# Altium PCB SysUprTestUULed.PcbDoc
Units mm, origin at the board's own origin, x right, y up, seen from the top; angles counter-clockwise.
Board outline 74 x 89.7 mm, 4 copper layers (Top Layer, Mid-Layer 1, Mid-Layer 2, Bottom Layer), stack 1.572 mm thick; 132 components, 164 nets, 460 pads, 163 vias.
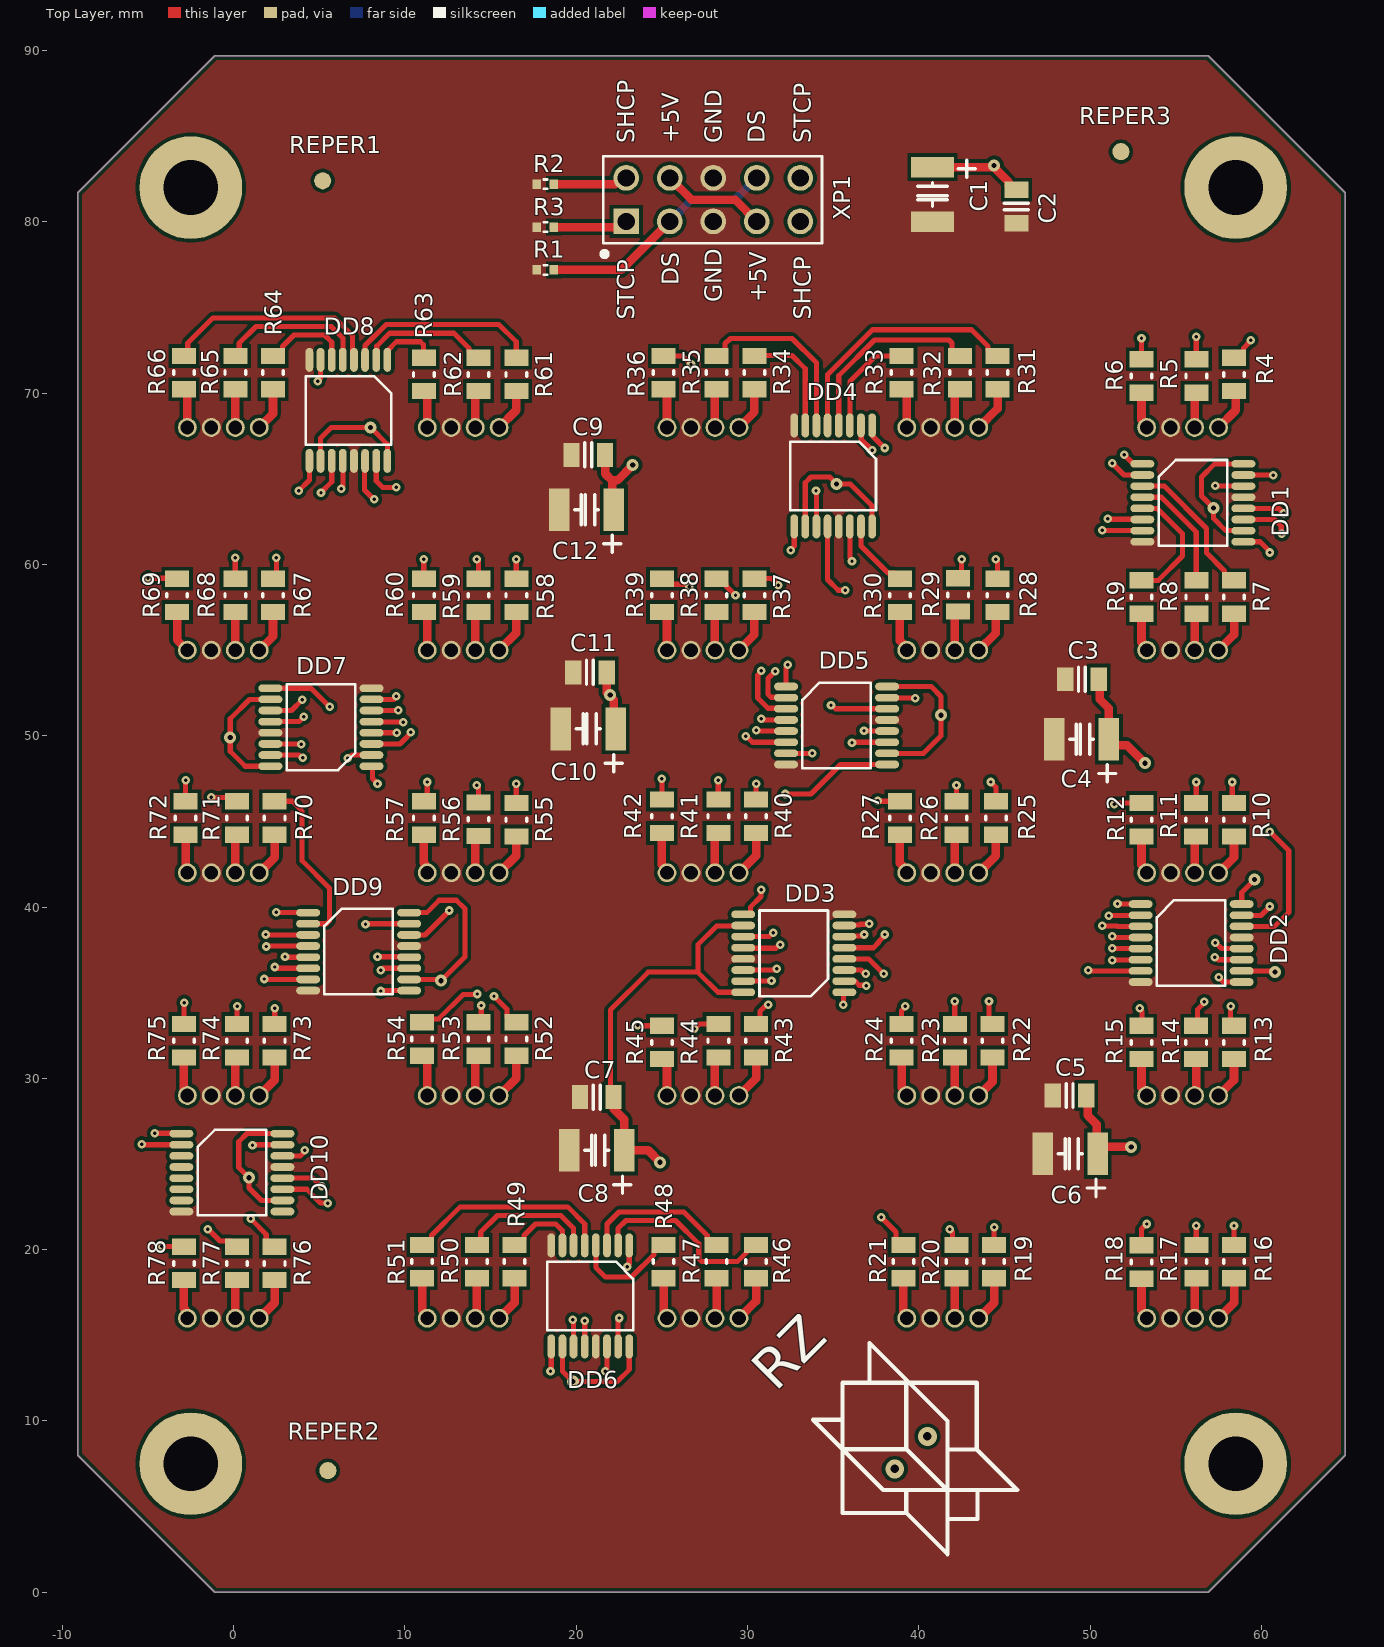
[diagram p0: Top Layer view]
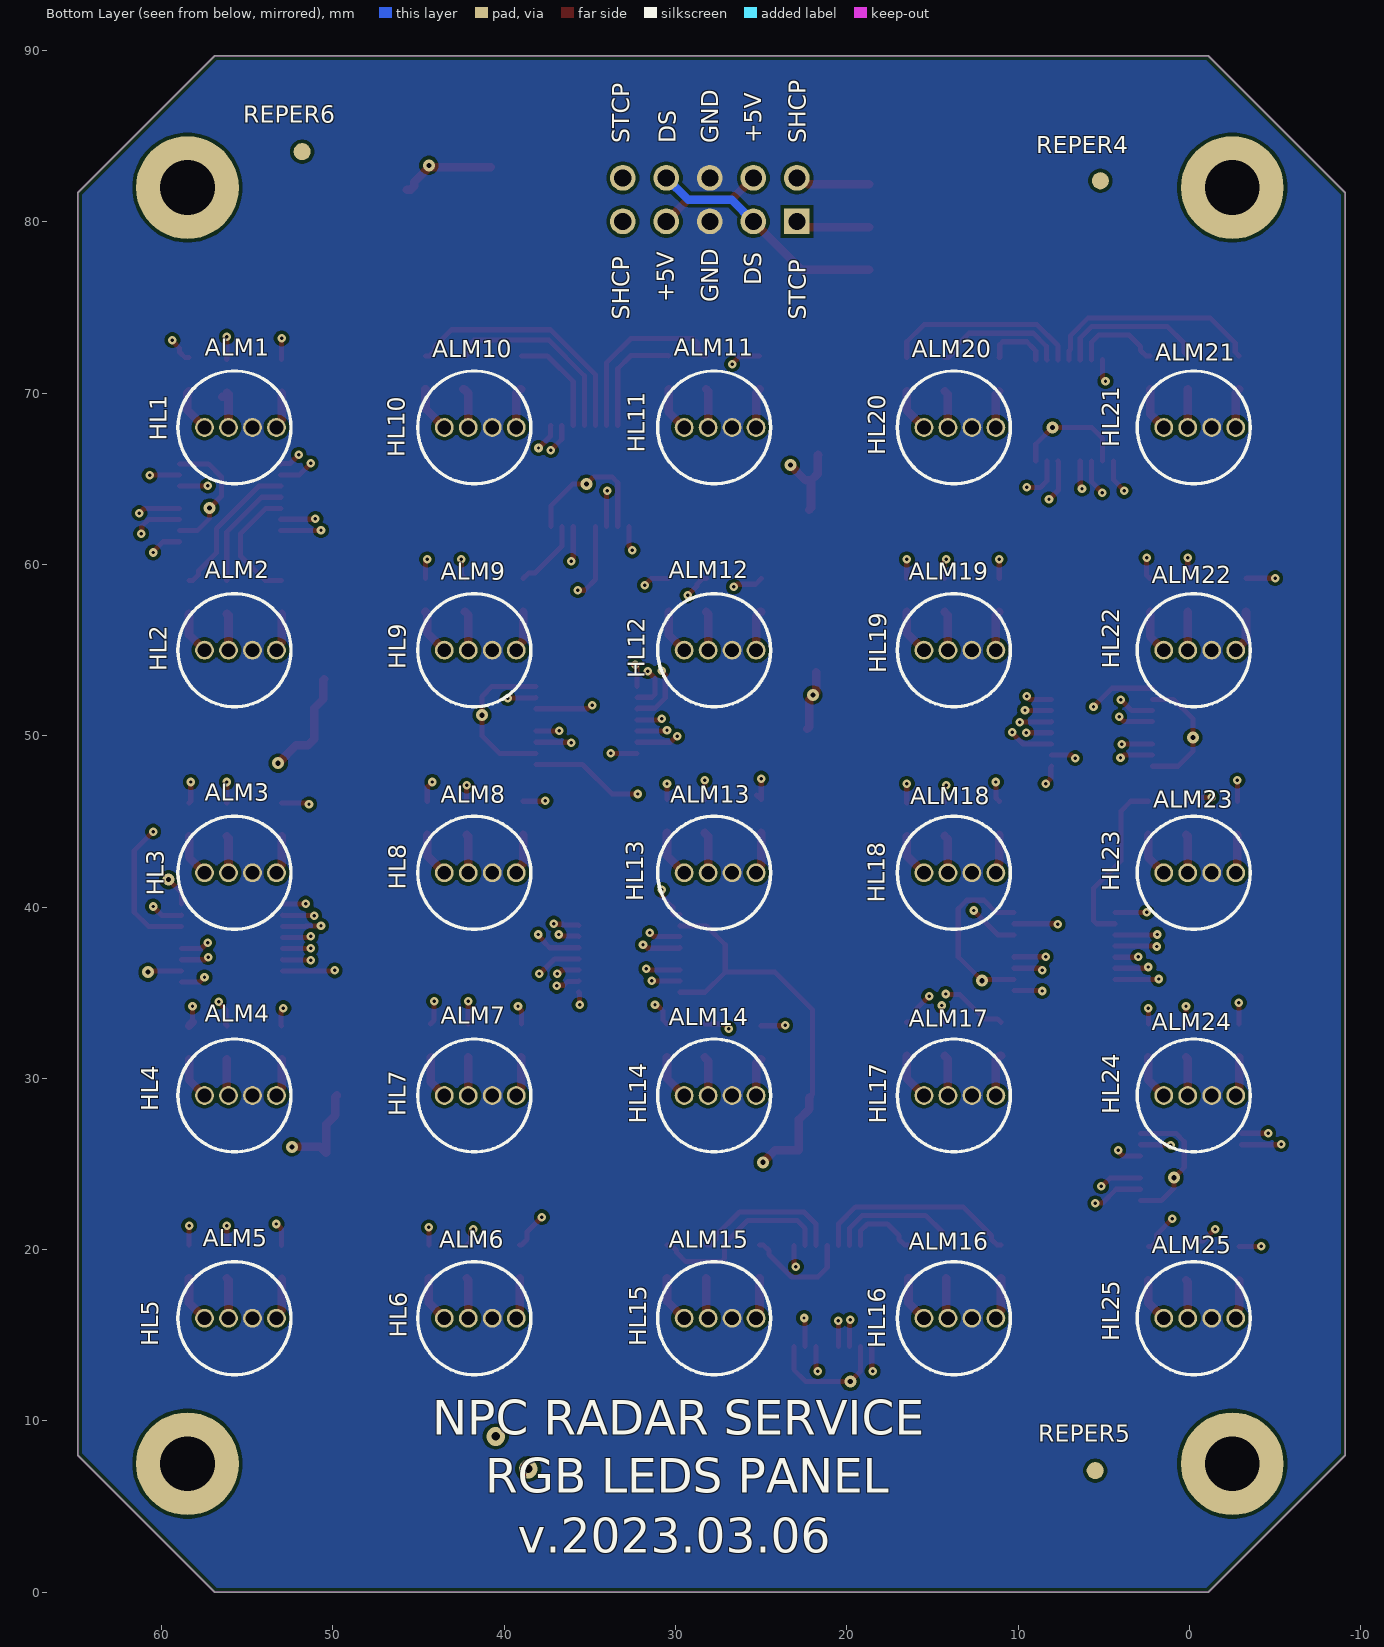
[diagram p1: Bottom Layer view, seen from below]
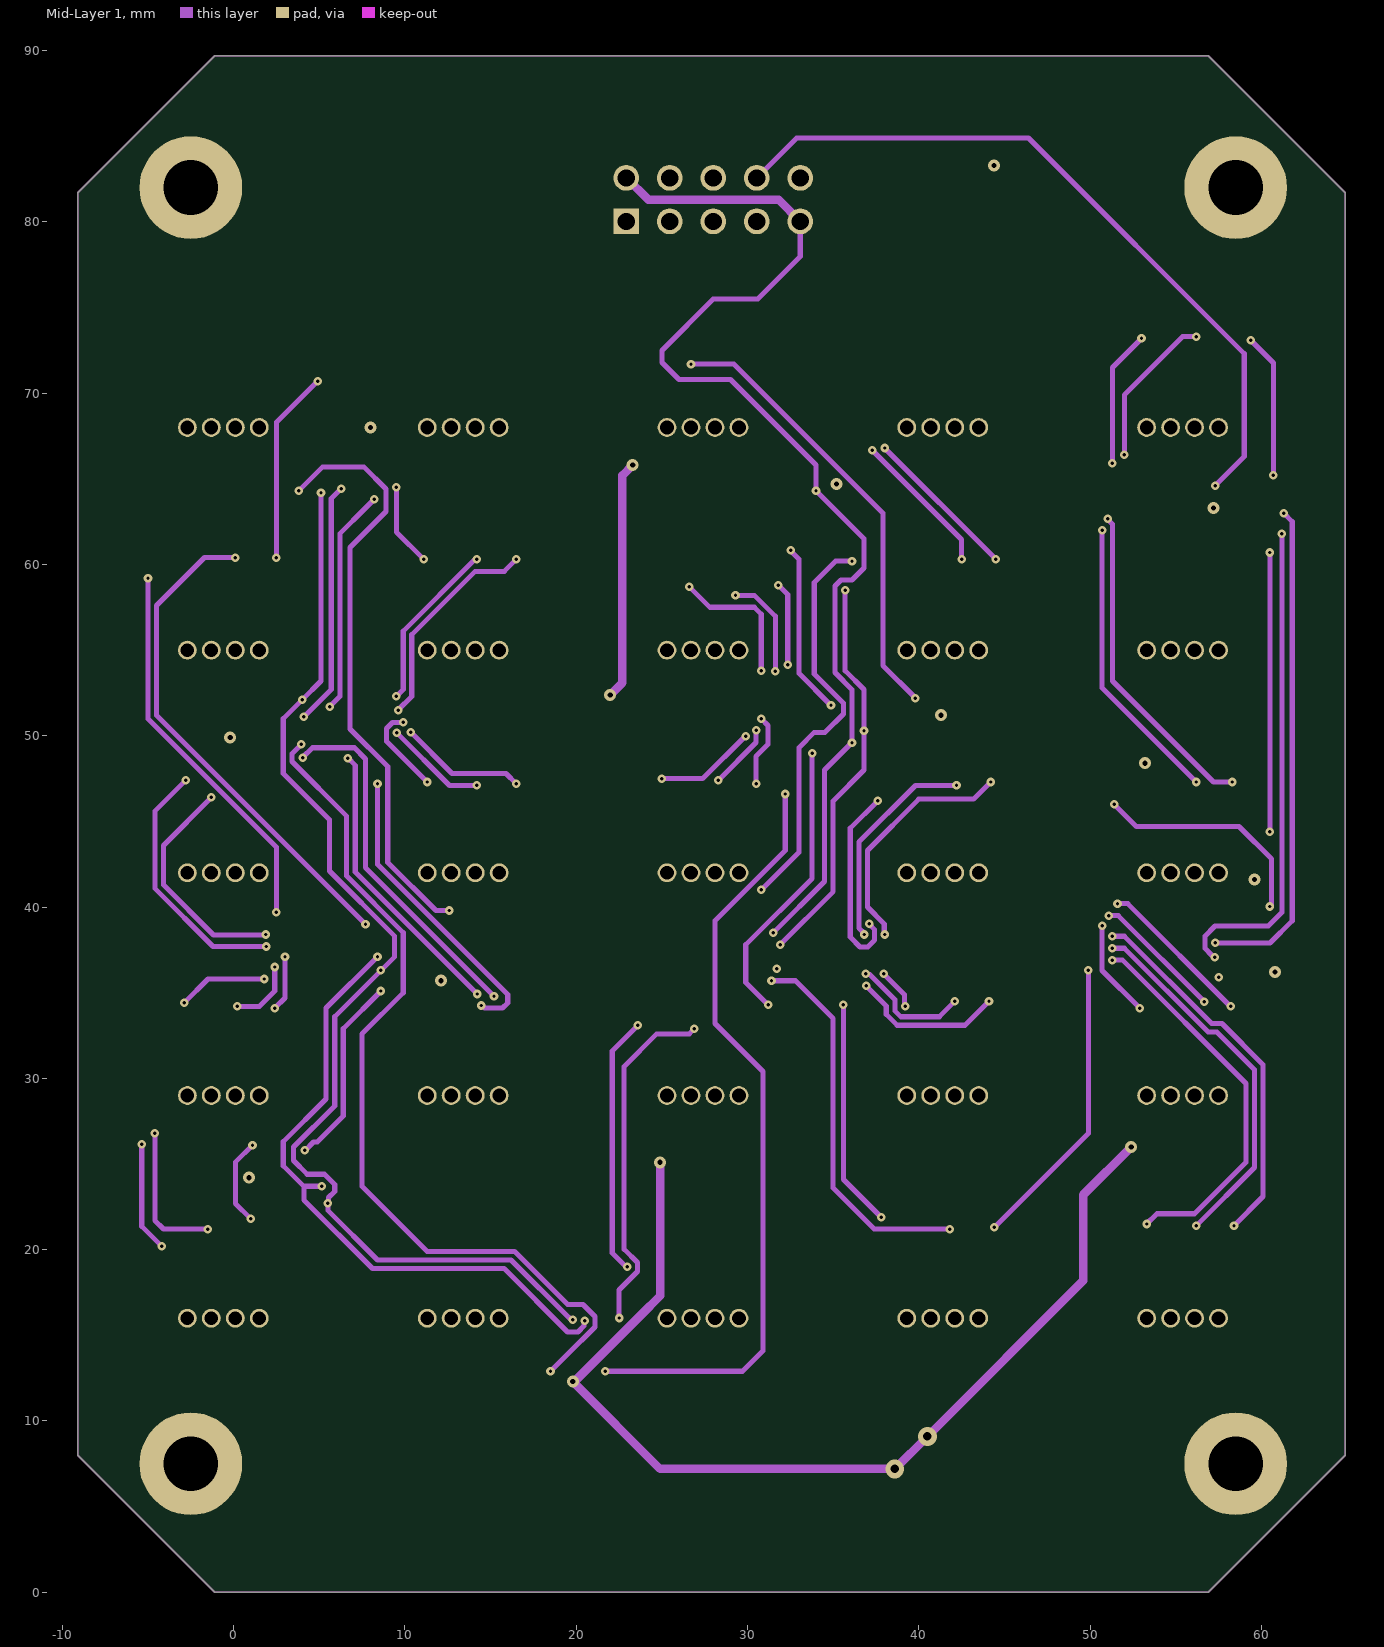
[diagram p2: Mid-Layer 1]
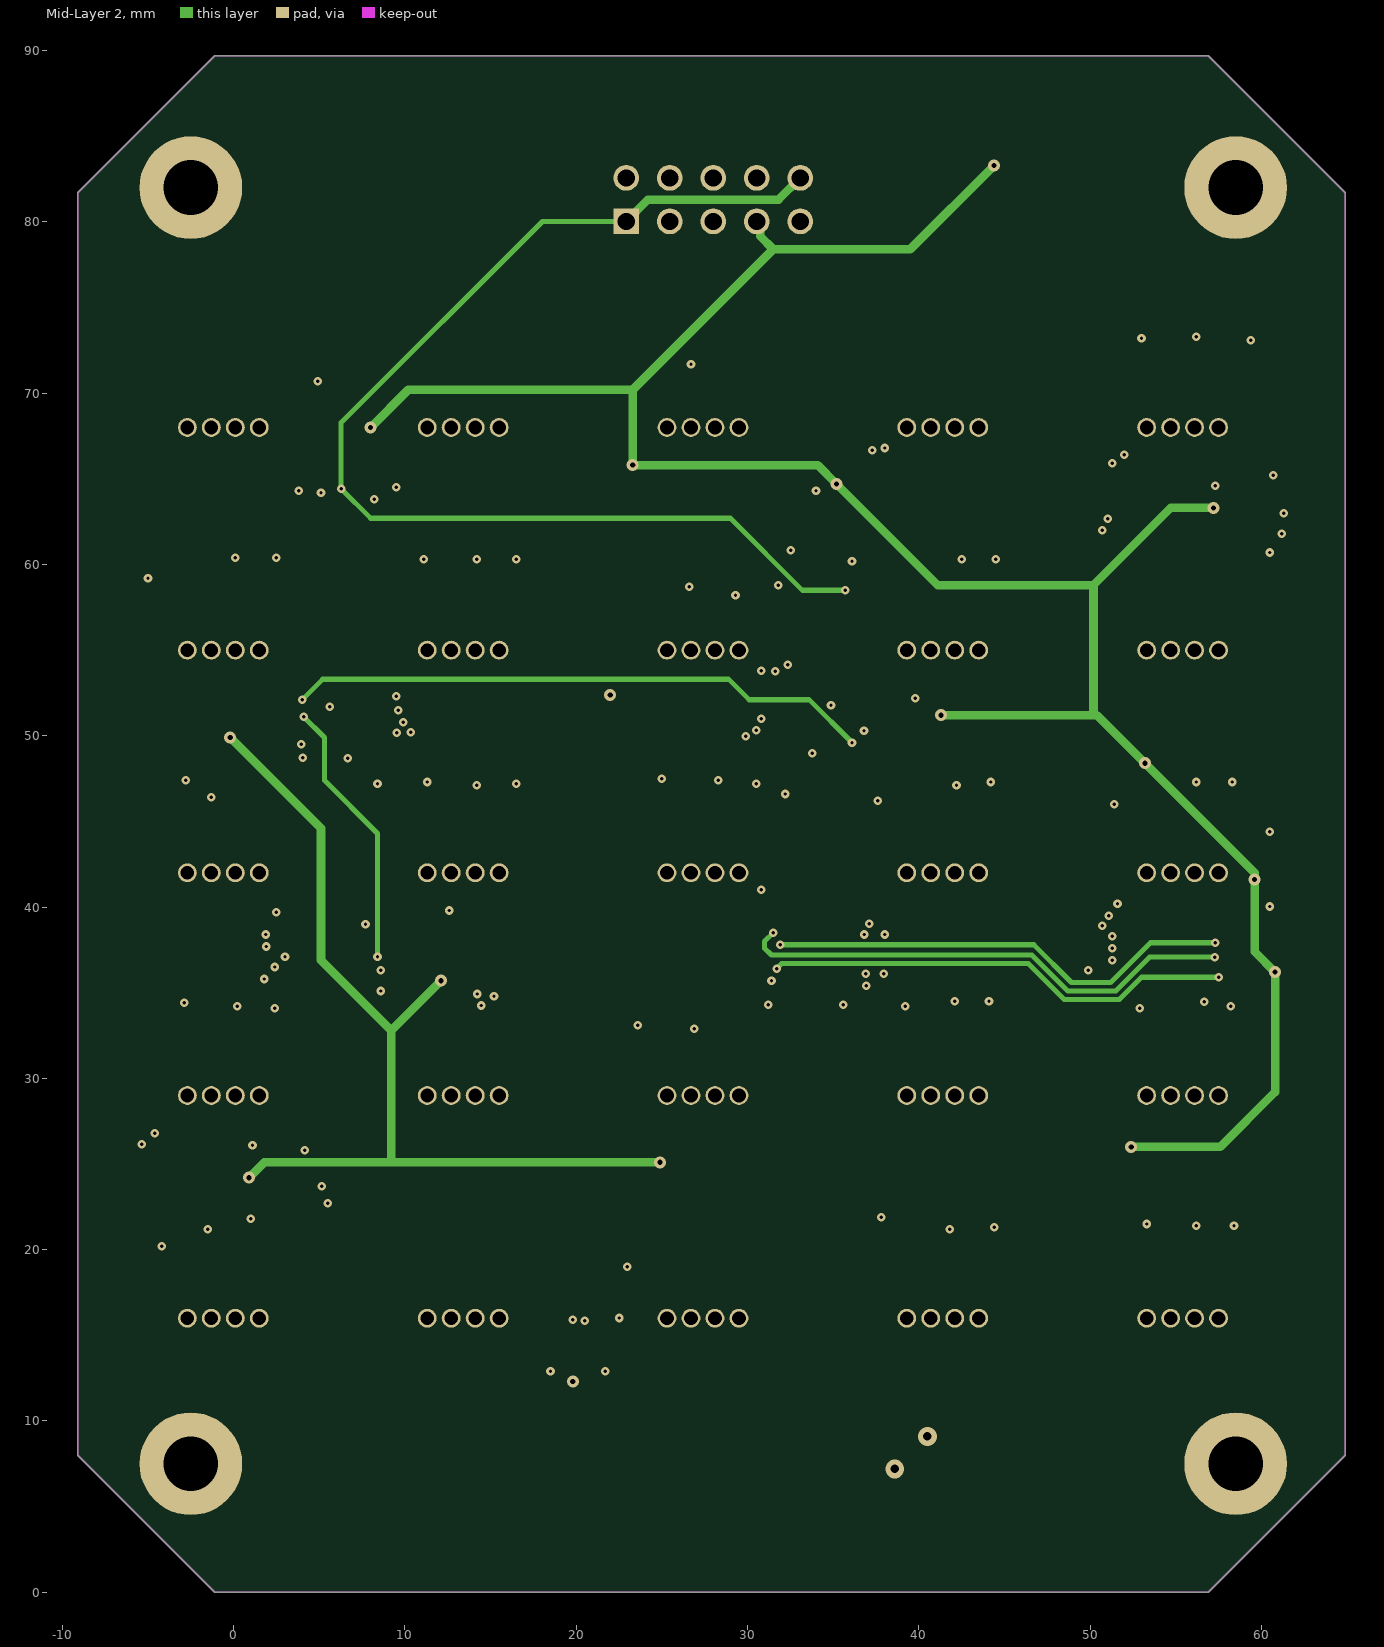
[diagram p3: Mid-Layer 2]

## Layer stack, top to bottom
Top Solder: solder mask 0.0102, Solder Resist, Dk 3.5
Top Layer: signal copper 0.018
Dielectric 2: core 0.5, FR-4, Dk 4.1
Mid-Layer 1: signal copper 0.018
Dielectric 1: prepreg 0.5, FR-4, Dk 4.8
Mid-Layer 2: signal copper 0.018
Dielectric 3: core 0.5, FR-4, Dk 4.1
Bottom Layer: signal copper 0.018
Bottom Solder: solder mask 0.0102, Solder Resist, Dk 3.5

## Board outline
-9.1,8 -9.1,81.7 -1.1,89.7 56.9,89.7 64.9,81.7 64.9,8 56.9,0 -1.1,0

## Design rules (kind name [scope] priority, off if disabled: settings)
Clearance [All] p1: gap=0.2 ignorepadtopadclearanceinfootprint=FALSE except(0: Arc-Hole Track-Hole SMDPad-Hole THPad-Hole Via-Hole Fill-Hole Poly-Hole Region-Hole Text-Hole)
PlaneConnect [All] p1: planeconnectstyle=Direct reliefexpansion=0.508 reliefentries=4 reliefconductorwidth=0.254 reliefairgap=0.254
PolygonConnect [All] p1: connectstyle=Direct reliefconductorwidth=0.254 reliefentries=4 polygonreliefangle="90 Angle" airgapwidth=0.254
RoutingVias [All] p1: holewidth=0.3 width=0.7 viastyle="Through Hole" minholewidth=0.2 minwidth=0.5 maxholewidth=0.5 maxwidth=1.1
SolderMaskExpansion [All] p1: expansion=0.05 istentingtop=FALSE
Width Width_1 [All] p1: maxlimit=1 minlimit=0.3 preferedwidth=0.5
29 further rules are at their usual default settings.

## Components (designator, comment, footprint, x,y, rotation, side; value= is the part's Value field where it differs from the comment)
C1 "PolCap" CapCaseB 40.8,81.6 r180 top value=4,7мк
C2 "Capacitor" Cap0805 45.7,80.9 r0 top value=0,1мк
C3 "Capacitor" Cap0805 49.525,53.3 r90 top value=0,1мк
C4 "PolCap" CapCaseB 49.5,49.8 r90 top value=4,7мк
C5 "Capacitor" Cap0805 48.8,29 r90 top value=0,1мк
C6 "PolCap" CapCaseB 48.846,25.6 r90 top value=4,7мк
C7 "Capacitor" Cap0805 21.2,28.9 r90 top value=0,1мк
C8 "PolCap" CapCaseB 21.2,25.8 r90 top value=4,7мк
C9 "Capacitor" Cap0805 20.7,66.4 r90 top value=0,1мк
C10 "PolCap" CapCaseB 20.7,50.4 r90 top value=4,7мк
C11 "Capacitor" Cap0805 20.8,53.7 r90 top value=0,1мк
C12 "PolCap" CapCaseB 20.6,63.2 r90 top value=4,7мк
DD1 "74HC595" TSSOP16 56,63.6 r0 top
DD2 "74HC595" TSSOP16 55.9,37.9 r0 top
DD3 "74HC595" TSSOP16 32.7,37.3 r180 top
DD4 "74HC595" TSSOP16 35,65.171 r270 top
DD5 "74HC595" TSSOP16 35.2,50.6 r0 top
DD6 "74HC595" TSSOP16 20.821,17.3 r270 top
DD7 "74HC595" TSSOP16 5.1,50.5 r180 top
DD8 "74HC595" TSSOP16 6.7,69 r270 top
DD9 "74HC595" TSSOP16 7.3,37.4 r0 top
DD10 "74HC595" TSSOP16 -0.1,24.5 r0 top
HL1 "LED-RGB_C" BL-L515 57.5,68 r180 bottom
HL2 "LED-RGB_C" BL-L515 57.5,55 r180 bottom
HL3 "LED-RGB_C" BL-L515 57.5,42 r180 bottom
HL4 "LED-RGB_C" BL-L515 57.5,29 r180 bottom
HL5 "LED-RGB_C" BL-L515 57.5,16 r180 bottom
HL6 "LED-RGB_C" BL-L515 43.5,16 r180 bottom
HL7 "LED-RGB_C" BL-L515 43.5,29 r180 bottom
HL8 "LED-RGB_C" BL-L515 43.5,42 r180 bottom
HL9 "LED-RGB_C" BL-L515 43.5,55 r180 bottom
HL10 "LED-RGB_C" BL-L515 43.5,68 r180 bottom
HL11 "LED-RGB_C" BL-L515 29.5,68 r180 bottom
HL12 "LED-RGB_C" BL-L515 29.5,55 r180 bottom
HL13 "LED-RGB_C" BL-L515 29.5,42 r180 bottom
HL14 "LED-RGB_C" BL-L515 29.5,29 r180 bottom
HL15 "LED-RGB_C" BL-L515 29.5,16 r180 bottom
HL16 "LED-RGB_C" BL-L515 15.5,16 r180 bottom
HL17 "LED-RGB_C" BL-L515 15.5,29 r180 bottom
HL18 "LED-RGB_C" BL-L515 15.5,42 r180 bottom
HL19 "LED-RGB_C" BL-L515 15.5,55 r180 bottom
HL20 "LED-RGB_C" BL-L515 15.5,68 r180 bottom
HL21 "LED-RGB_C" BL-L515 1.5,68 r180 bottom
HL22 "LED-RGB_C" BL-L515 1.5,55 r180 bottom
HL23 "LED-RGB_C" BL-L515 1.5,42 r180 bottom
HL24 "LED-RGB_C" BL-L515 1.5,29 r180 bottom
HL25 "LED-RGB_C" BL-L515 1.5,16 r180 bottom
R1 "Resistor0062" Res0402 18.2,77.2 r90 top value=10к
R2 "Resistor0062" Res0402 18.2,82.2 r90 top value=10к
R3 "Resistor0062" Res0402 18.2,79.7 r90 top value=10к
R4 "Resistor0125" Res0805 58.404,71.1 r180 top value=1к
R5 "Resistor0125" Res0805 56.2,71 r180 top value=1к
R6 "Resistor0125" Res0805 53,71 r180 top value=1к
R7 "Resistor0125" Res0805 58.404,58.1 r180 top value=1к
R8 "Resistor0125" Res0805 56.2,58.1 r180 top value=1к
R9 "Resistor0125" Res0805 53,58.1 r180 top value=1к
R10 "Resistor0125" Res0805 58.4,45.1 r180 top value=1к
R11 "Resistor0125" Res0805 56.196,45.1 r180 top value=1к
R12 "Resistor0125" Res0805 53,45.1 r180 top value=1к
R13 "Resistor0125" Res0805 58.4,32.1 r180 top value=1к
R14 "Resistor0125" Res0805 56.196,32.1 r180 top value=1к
R15 "Resistor0125" Res0805 53,32.1 r180 top value=1к
R16 "Resistor0125" Res0805 58.404,19.3 r180 top value=1к
R17 "Resistor0125" Res0805 56.2,19.3 r180 top value=1к
R18 "Resistor0125" Res0805 53,19.275 r180 top value=1к
R19 "Resistor0125" Res0805 44.4,19.3 r180 top value=1к
R20 "Resistor0125" Res0805 42.196,19.3 r180 top value=1к
R21 "Resistor0125" Res0805 39.1,19.3 r180 top value=1к
R22 "Resistor0125" Res0805 44.304,32.2 r180 top value=1к
R23 "Resistor0125" Res0805 42.1,32.2 r180 top value=1к
R24 "Resistor0125" Res0805 39,32.2 r180 top value=1к
R25 "Resistor0125" Res0805 44.5,45.2 r180 top value=1к
R26 "Resistor0125" Res0805 42.2,45.2 r180 top value=1к
R27 "Resistor0125" Res0805 38.9,45.2 r180 top value=1к
R28 "Resistor0125" Res0805 44.6,58.2 r180 top value=1к
R29 "Resistor0125" Res0805 42.3,58.225 r180 top value=1к
R30 "Resistor0125" Res0805 38.9,58.2 r180 top value=1к
R31 "Resistor0125" Res0805 44.6,71.2 r180 top value=1к
R32 "Resistor0125" Res0805 42.396,71.2 r180 top value=1к
R33 "Resistor0125" Res0805 39,71.2 r180 top value=1к
R34 "Resistor0125" Res0805 30.404,71.2 r180 top value=1к
R35 "Resistor0125" Res0805 28.2,71.2 r180 top value=1к
R36 "Resistor0125" Res0805 25.1,71.2 r180 top value=1к
R37 "Resistor0125" Res0805 30.404,58.2 r180 top value=1к
R38 "Resistor0125" Res0805 28.2,58.2 r180 top value=1к
R39 "Resistor0125" Res0805 25,58.2 r180 top value=1к
R40 "Resistor0125" Res0805 30.5,45.3 r180 top value=1к
R41 "Resistor0125" Res0805 28.296,45.3 r180 top value=1к
R42 "Resistor0125" Res0805 25,45.3 r180 top value=1к
R43 "Resistor0125" Res0805 30.5,32.2 r180 top value=1к
R44 "Resistor0125" Res0805 28.296,32.2 r180 top value=1к
R45 "Resistor0125" Res0805 25,32.1 r180 top value=1к
R46 "Resistor0125" Res0805 30.5,19.3 r180 top value=1к
R47 "Resistor0125" Res0805 28.2,19.3 r180 top value=1к
R48 "Resistor0125" Res0805 25.1,19.3 r180 top value=1к
R49 "Resistor0125" Res0805 16.4,19.3 r180 top value=1к
R50 "Resistor0125" Res0805 14.196,19.3 r180 top value=1к
R51 "Resistor0125" Res0805 11,19.3 r180 top value=1к
R52 "Resistor0125" Res0805 16.5,32.3 r180 top value=1к
R53 "Resistor0125" Res0805 14.296,32.3 r180 top value=1к
R54 "Resistor0125" Res0805 11,32.3 r180 top value=1к
R55 "Resistor0125" Res0805 16.5,45.1 r180 top value=1к
R56 "Resistor0125" Res0805 14.296,45.125 r180 top value=1к
R57 "Resistor0125" Res0805 11.1,45.2 r180 top value=1к
R58 "Resistor0125" Res0805 16.5,58.2 r180 top value=1к
R59 "Resistor0125" Res0805 14.296,58.2 r180 top value=1к
R60 "Resistor0125" Res0805 11.1,58.2 r180 top value=1к
R61 "Resistor0125" Res0805 16.5,71.1 r180 top value=1к
R62 "Resistor0125" Res0805 14.296,71.1 r180 top value=1к
R63 "Resistor0125" Res0805 11.1,71.1 r180 top value=1к
R64 "Resistor0125" Res0805 2.3,71.2 r180 top value=1к
R65 "Resistor0125" Res0805 0.096,71.2 r180 top value=1к
R66 "Resistor0125" Res0805 -2.9,71.2 r180 top value=1к
R67 "Resistor0125" Res0805 2.3,58.2 r180 top value=1к
R68 "Resistor0125" Res0805 0.096,58.2 r180 top value=1к
R69 "Resistor0125" Res0805 -3.3,58.2 r180 top value=1к
R70 "Resistor0125" Res0805 2.4,45.2 r180 top value=1к
R71 "Resistor0125" Res0805 0.196,45.2 r180 top value=1к
R72 "Resistor0125" Res0805 -2.8,45.2 r180 top value=1к
R73 "Resistor0125" Res0805 2.4,32.2 r180 top value=1к
R74 "Resistor0125" Res0805 0.196,32.2 r180 top value=1к
R75 "Resistor0125" Res0805 -2.9,32.2 r180 top value=1к
R76 "Resistor0125" Res0805 2.4,19.2 r180 top value=1к
R77 "Resistor0125" Res0805 0.196,19.2 r180 top value=1к
R78 "Resistor0125" Res0805 -2.9,19.2 r180 top value=1к
REPER1 "Comment" REPER1 5.2,82.4 r0 top
REPER2 "Comment" REPER1 5.5,7.1 r0 top
REPER3 "Comment" REPER1 51.8,84.1 r0 top
REPER4 "Comment" REPER1 5.2,82.4 r180 bottom
REPER5 "Comment" REPER1 5.5,7.1 r180 bottom
REPER6 "Comment" REPER1 51.8,84.1 r180 bottom
XP1 "ConnectorP10" PLD-10 28,81.3 r90 top value=10

## Footprints (in the part's own frame and the unit in brackets; to place one, negate y for a bottom-side part, rotate by r counter-clockwise, add the part's x,y. Pads: shape width x height; smd on the part's side, far side on the other; paste and mask are expansions set on the pad)
BL-L515 [mm]
  round 1.1 hole 0.8: 1(0,0) 2(1.4,0) 3(2.8,0) 4(4.2,0)
  silkscreen extent -1.55,-3.3 5.05,3.3, body extent -1.27,-2.95 4.63,2.95, height 9.1
Cap0805 [mm] "Chip Capacitor, 2-Leads, Body 2,00x1,25mm, IPC Medium Density"
  rect 1.4x0.95 smd: 1(0,0.975) 2(0,-0.975)
  silkscreen extent -0.7,-0.2 0.7,0.2, body extent -0.62,-1 0.63,1, height 0.58
CapCaseB [mm]
  rect 2.5x1.2 smd: 1(0,1.6) 2(0,-1.6)
  silkscreen extent -2.5,-2 0.87,0.7, body extent -1.47,-1.85 1.46,1.85, height 2.03
PLD-10 [mm]
  rect 1.5x1.5 hole 1 mask+0: 1(-1.27,5.08)
  round 1.5 hole 1 mask+0: 2(1.27,5.08) 3(-1.27,2.54) 4(1.27,2.54) 5(-1.27,0) 6(1.27,0) 7(-1.27,-2.54) 8(1.27,-2.54) 9(-1.27,-5.08) 10(1.27,-5.08)
  silkscreen extent -3.32,-6.35 2.54,6.5, body extent -2.5,-6.35 2.5,6.35, height 8.5
REPER1 [mm] "Diameter = 1mm"
  round 1 smd mask+0.5: REP(0,0)
Res0402 [mm] "Chip Resistor, 2-Leads, Body 1,00x0,50mm, IPC Medium Density"
  rect 0.55x0.5 smd: 1(0,0.5) 2(0,-0.5)
  silkscreen extent -0.28,-0.1 0.27,0.1, body extent -0.25,-0.5 0.25,0.5, height 0.4
Res0805 [mm] "Chip Resistor, 2-Leads, Body 2,00x1,25mm, IPC Medium Density"
  rect 1.4x0.95 smd: 1(0,0.975) 2(0,-0.975)
  silkscreen extent -0.6,-0.1 0.6,0.1, body extent -0.63,-1 0.63,1, height 0.43
TSSOP16 [mm] "Chip Inductor, 2-Leads, Body 1,00x0,50mm, IPC Medium Density"
  oval 1.4x0.45 smd: 1(-2.95,2.275) 2(-2.95,1.625) 3(-2.95,0.975) 4(-2.95,0.325) 5(-2.95,-0.325) 6(-2.95,-0.975) 7(-2.95,-1.625) 8(-2.95,-2.275) 9(2.95,-2.275) 10(2.95,-1.625) 11(2.95,-0.975) 12(2.95,-0.325) 13(2.95,0.325) 14(2.95,0.975) 15(2.95,1.625) 16(2.95,2.275)
  silkscreen extent -2,-2.5 2,2.5, body extent -3.23,-2.55 3.23,2.55, height 1.25

## Part data
C1 C4 C6 C8 C10 C12: library part 2164, Manufacturer="АО «НИИ ГИРИКОНД»", ManufacturerTU=АЖЯР.673546.001ТУ, Package="K2 (Case B)", PartNumber="К53-56А-16 В-4,7 мкФ±20 %", SolderTemperature=265, TemperatureRange="от минус 60 до 125", VoltageLimit=16, Alternative="Case B 4,7 мкФ, 16 В, ±20 %", Alternative2="К53-56А-16 В-4,7 мкФ±20 % В АДПК.673546.005ТУ", CardKRR=67, ComponentLink1Description=К53-56А, ComponentLink1URL=\\192.168.0.253\U_Base\PDF\C\K53-56.pdf, DataSheet=#\\192.168.0.253\U_Base\PDF\C\К53-56А.pdf#, Group=Конденсаторы, HelpURL=\\192.168.0.253\U_Base\PDF\C\K53-56.pdf, key=2164, MilitaryControl=ВП, Modify=13.03.2019, MountType=ПМ, Name=К53-56А, SolderName=K53-56A-16V-4.7mkF, ViewControl="В, 10%", X_SORT_1=100, X_SORT_2=200, X_SORT_3=1
C2 C3 C5 C7 C9 C11: library part 2161, Manufacturer="ОАО «ВЗРД Монолит»", ManufacturerTU=ФЦТА.673516.016ТУ, Package="0805 (2012)", PartNumber="К10-84в-2012М-50 В-Н90-0,1 мкФ+80 %-20 %-N-A", SolderTemperature=175, TemperatureRange="от минус 60 до 85", VoltageLimit=50, Alternative="0805 0,1 мкФ, 50 В, ±10 %", CardKRR=67, ComponentLink1Description=К10-84, ComponentLink1URL=\\192.168.0.253\U_Base\PDF\C\K10-84.pdf, DataSheet=#\\192.168.0.253\U_Base\PDF\C\K10-84.pdf#, Group=Конденсаторы, HelpURL=\\192.168.0.253\U_Base\PDF\C\K10-84.pdf, key=2161, MilitaryControl=ВП, Modify=13.03.2019, MountType=ПМ, Name=К10-84в, SolderName=K10-84v-2012M-50V-N90-0,1mkF, ViewControl="В, 10%", X_SORT_1=100, X_SORT_2=200, X_SORT_3=1
DD1 DD2 DD3 DD4 DD5 DD6 DD7 DD8 DD9 DD10: library part 40, Manufacturer=ONSemiconductor, Package=TSSOP16, PartNumber=74НС595PW, TemperatureRange="от минус 40 до 125", CardKRR=65, ComponentLink1URL=\\192.168.0.101\U_Base\PDF\D\74HC595PW.pdf, DataSheet=#\\192.168.0.101\U_Base\PDF\D\74HC595PW.pdf#, Group=Микросхемы, HelpURL=\\192.168.0.101\U_Base\PDF\D\74HC595PW.pdf, key=40, MilitaryControl=ОТК, Modify=14.03.2019, MountType=ПМ, Name=74НС595PW, Notice=ONSemiconductor, SolderName=74NS595PW, ViewControl="В, 100%", X_SORT_1=200, X_SORT_2=401, X_SORT_3=1
HL1 HL2 HL3 HL4 HL5 HL6 HL7 HL8 HL9 HL10 HL11 HL12 HL13 HL14 HL15 HL16 HL17 HL18 HL19 HL20 HL21 HL22 HL23 HL24 HL25: library part 90, "Светодиод RGB с общим анодом BL-L515RGBW-CA", Manufacturer="Betlux Electronics", Package=6mm, PartNumber="Светодиод BL-L515RGBW-CС", ComponentLink1Description=BL-L515, ComponentLink1URL="\\192.168.0.101\U_Base\PDF\V\BetLux Electronics.pdf", DataSheet="#\\192.168.0.101\U_Base\PDF\V\BetLux Electronics.pdf#", Group=Светодиоды, HelpURL="\\192.168.0.101\U_Base\PDF\V\BetLux Electronics.pdf", key=90, MilitaryControl=ОТК, Modify=14.03.2019, MountType=РМ, Name=BL-L515, Notice="Betlux Electronics", SolderName=BL-L515, ViewControl="В, 10%", X_SORT_1=500, X_SORT_2=301, X_SORT_3=1
R1 R2 R3: library part 2905, Manufacturer="АО «НПО «Эркон»", ManufacturerTU=ОЖ0.467.164ТУ, Package="0402 (1005)", PartNumber="Р1-8В-0,063-10 кОм±5 %-Т-А", PowerLimit=0,063, SolderTemperature=255, TemperatureRange="от минус 65 до 155", VoltageLimit=50, Alternative="0402 10 кОм, 0,062 Вт, ±5 %", Alternative2="Р1-8В-0,062-10 кОм±5 %-Т-А ОЖ0.467.164ТУ", CardKRR=68, ComponentLink1Description=Р1-8В, ComponentLink1URL=\\192.168.0.253\U_Base\PDF\R\Р1-8В.pdf, DataSheet=#\\192.168.0.253\U_Base\PDF\R\Р1-8В.pdf#, Group=Резисторы, HelpURL=\\192.168.0.253\U_Base\PDF\R\Р1-8В.pdf, key=2905, Mark=103, Mass=0,0007, MilitaryControl=ВП, Modify=28.06.2019, MountType=ПМ, Name=Р1-8В, SolderName=R1-8B-0.063-10kOm, ViewControl="В, 10%", X_SORT_1=400, X_SORT_2=100, X_SORT_3=1
R4 R5 R6 R7 R8 R9 R10 R11 R12 R13 R14 R15 R16 R17 R18 R19 R20 R21 R22 R23 R24 R25 R26 R27 R28 R29 R30 R31 R32 R33 R34 R35 R36 R37 R38 R39 R40 R41 R42 R43 R44 R45 R46 R47 R48 R49 R50 R51 R52 R53 R54 R55 R56 R57 R58 R59 R60 R61 R62 R63 R64 R65 R66 R67 R68 R69 R70 R71 R72 R73 R74 R75 R76 R77 R78: library part 2957, Manufacturer="АО «НПО «Эркон»", ManufacturerTU=ОЖ0.467.164ТУ, Package="0805 (2012)", PartNumber="Р1-8В-0,125-1 кОм±5 %-Т-А", PowerLimit=0,125, SolderTemperature=255, TemperatureRange="от минус 65 до 155", VoltageLimit=150, Alternative="0805 1 кОм, 0,125 Вт, ±5 %", Alternative2="Р1-8В-0,125-1 кОм±5 %-Т-А ОЖ0.467.164ТУ", CardKRR=68, ComponentLink1Description=Р1-8В, ComponentLink1URL=\\192.168.0.101\U_Base\PDF\R\Р1-8В.pdf, DataSheet=#\\192.168.0.101\U_Base\PDF\R\Р1-8В.pdf#, Group=Резисторы, HelpURL=\\192.168.0.101\U_Base\PDF\R\Р1-8В.pdf, key=2957, Mark=102, Mass=0,006, MilitaryControl=ВП, Modify=28.06.2019, MountType=ПМ, Name=Р1-8В, SolderName=R1-8B-0.125-1kOm, ViewControl="В, 10%", X_SORT_1=400, X_SORT_2=100, X_SORT_3=1
REPER1 REPER2 REPER3 REPER4 REPER5 REPER6: library part 27
XP1: library part 45, CurrentLimit=1, Manufacturer="АО «Карачевский завод Электродеталь»", ManufacturerTU=РЮМК.430420.011ТУ, Package=PLD, PartNumber="Вилка СНП346-10ВП22-2-В", PowerLimit=250, TemperatureRange="от минус 60 до 85", Alternative=PLD-10, Alternative2="СНП346-10ВП22-2 РЮМК.430420.019ТУ", CardKRR=75, ComponentLink1Description=СНП346, ComponentLink1URL=\\192.168.0.101\U_Base\PDF\X\СНП346.pdf, Conn01Name=LED_STCP, Conn02Name=LED_SHCP, Conn03Name=LED_DS, Conn04Name=+5V, Conn05Name=GND, Conn06Name=GND, Conn07Name=+5V, Conn08Name=LED_DS, Conn09Name=LED_SHCP, Conn10Name=LED_STCP, Conn11Name=11, Conn12Name=12, Conn13Name=13, Conn14Name=14, Conn15Name=15, Conn16Name=16, Conn17Name=17, Conn18Name=18, Conn19Name=19, Conn20Name=20, Conn21Name=21, Conn22Name=22, Conn23Name=23, Conn24Name=24, Conn25Name=25, Conn26Name=26, Conn27Name=27, Conn28Name=28, Conn29Name=29, Conn30Name=30, Conn31Name=31, Conn32Name=32, Conn33Name=33, Conn34Name=34, Conn35Name=35, Conn36Name=36, Conn37Name=37, Conn38Name=38, Conn39Name=39, Conn40Name=40, DataSheet=#\\192.168.0.101\U_Base\PDF\X\СНП346.pdf#, Group=Соединители, HelpURL=\\192.168.0.101\U_Base\PDF\X\СНП346.pdf, key=45, Mass=0,0006, MilitaryControl=ВП, Modify=19.09.2018, MountType=РМ, Name=СНП346-10ВП22-2-В, SolderName=SNP346-10VP22-2, ViewControl="В, 10%", VoltageLimit=250, X_SORT_1=700, X_SORT_2=600, X_SORT_3=1

## Free pads (board coordinates)
  round 6 hole 3.2 unplated: 0(-2.5,7.5) 0(-2.5,82) 0(58.5,7.5) 0(58.5,82)

## Via types
v1: diameter 0.5, hole 0.2, Top Layer to Bottom Layer, tented both sides, 145 vias
v2: diameter 0.7, hole 0.3, Top Layer to Bottom Layer, tented both sides, 16 vias
v3: diameter 1.1, hole 0.5, Top Layer to Bottom Layer, tented both sides, 2 vias

## Nets (pads, with @x,y where several pads share a name; then routed paths per layer and width w, separated by ;. In a path a pad name is that pad's centre, name@x,y a point inside that pad or via, vN(x,y) a via of type N, cw(c..) or ccw(c..) an arc to the next point about the centre after c; other vN are vias at no path point)
+5V_D: C1.2 C2.1 C3.2 C4.2 C5.2 C6.2 C7.2 C8.2 C9.2 C10.2 C11.2 C12.2 DD1.10 DD1.16 DD2.10 DD2.16 DD3.10 DD3.16 DD4.10 DD4.16 DD5.10 DD5.16 DD6.10 DD6.16 DD7.10 DD7.16 DD8.10 DD8.16 DD9.10 DD9.16 DD10.10 DD10.16 XP1.4 XP1.7 | length 397.6
  Top Layer w0.3: DD7.16 0.675,48.225 -0.2,49.1 -0.2,51 0.925,52.125 DD7.10 ; DD10.10 1.625,22.875 0.9,23.6 v2(0.9,24.2) 0.3,24.8 0.3,26.3 0.775,26.775 DD10.16 ; DD8.10 5.075,67.375 5.7,68 v2(8,68) 8.975,67.025 DD8.16 ; DD9.10 12.025,35.775 v2(12.1,35.7) 13.5,37.1 13.5,39.9 13,40.4 12,40.4 11.275,39.675 DD9.16 ; DD6.10 19.196,12.904 v2(19.8,12.3) 22.4,12.3 23.096,12.996 DD6.16 ; C7.2 22,29.075 22,34 24.2,36.2 27.1,36.2 ; DD3.16 28.275,35.025 27.1,36.2 ; DD3.10 29.725,38.9 28.2,38.9 27.1,37.8 27.1,36.2 ; DD4.10 33.375,64.775 33.7,65.1 34.8,65.1 v2(35.2,64.7) 36,64.7 37.275,63.425 DD4.16 ; DD5.10 40.275,48.975 41.3,50 v2(41.3,51.2) 41.3,52.3 40.725,52.875 DD5.16 ; DD2.10 60.725,36.275 v2(60.8,36.2) ; DD2.16 58.85,40.85 v2(59.6,41.6) ; DD1.10 57.925,61.975 57.2,62.7 v2(57.2,63.3) 56.5,64 56.5,65.1 57.275,65.875 DD1.16
  Top Layer w0.5: C9.2 21.7,66.375 21.7,65.3 22.093,64.907 ; v2@21.775,52.525 C11.2 ; C7.2 22.2,28.875 22.2,28.2 22.8,27.6 C8.2 24.2,25.8 v2(24.9,25.1) ; v2@22.193,52.107 22.193,50.507 C10.2 ; C12.2 22.093,63.307 22.093,64.907 ; v2(23.3,65.8) 22.407,64.907 22.093,64.907 ; XP1.4 26.73,81.3 29.27,81.3 XP1.7 ; C1.2 44.375,83.2 45.25,82.325 45.25,82.1 45.475,81.875 C2.1 ; C5.2 49.855,28.92 49.855,27.845 50.393,27.307 50.393,25.653 50.74,26 v2(52.4,26) ; C3.2 50.557,53.243 50.557,52.143 51.1,51.6 C4.2 51.1,49.793 51.45,49.443 52.157,49.443 v2(53.2,48.4)
  Mid-Layer 1 w0.5: v2(21.984,52.384) 22.7,53.1 22.7,65.2 v2(23.3,65.8) ; v2(24.9,25.1) 24.9,17.3 23.8,16.2 20,12.4 19.954,12.4 19.854,12.3 v2(19.8,12.3) 24.9,7.2 v3(38.6,7.2) v3(40.5,9.1) 49.6,18.2 49.6,23.2 v2(52.4,26)
  Mid-Layer 2 w0.5: v2(-0.2,49.9) 5.1,44.6 5.1,36.9 9.2,32.8 ; v2(0.9,24.2) 1.8,25.1 9.2,25.1 ; v2(8,68) 10.2,70.2 23.3,70.2 ; v2(12.1,35.7) 9.2,32.8 ; v2(24.9,25.1) 9.2,25.1 ; XP1.7 30.731,79.839 30.731,79.169 31.5,78.4 ; v2(41.3,51.2) 50.2,51.2 ; v2(44.4,83.3) 39.5,78.4 31.5,78.4 ; v2(52.4,26) 57.6,26 60.8,29.2 v2(60.8,36.2) 59.6,37.4 v2(59.6,41.6) 59.6,42 v2(53.2,48.4) 50.4,51.2 50.2,51.2 ; v2(57.2,63.3) 54.7,63.3 50.2,58.8 ; 9.2,25.1 9.2,32.8 ; 23.3,70.2 v2(23.3,65.8) 34.1,65.8 v2(35.2,64.7) 41.1,58.8 50.2,58.8 ; 23.3,70.2 31.5,78.4 ; 50.2,51.2 50.2,58.8
GND: C1.1 C2.2 C3.1 C4.1 C5.1 C6.1 C7.1 C8.1 C9.1 C10.1 C11.1 C12.1 DD1.8 DD1.13 DD2.8 DD2.13 DD3.8 DD3.13 DD4.8 DD4.13 DD5.8 DD5.13 DD6.8 DD6.13 DD7.8 DD7.13 DD8.8 DD8.13 DD9.8 DD9.13 DD10.8 DD10.13 HL1.3 HL2.3 HL3.3 HL4.3 HL5.3 HL6.3 HL7.3 HL8.3 HL9.3 HL10.3 HL11.3 HL12.3 HL13.3 HL14.3 HL15.3 HL16.3 HL17.3 HL18.3 HL19.3 HL20.3 HL21.3 HL22.3 HL23.3 HL24.3 HL25.3 R1.1 R2.1 R3.1 XP1.5 XP1.6
NetDD1_9: DD1.9 DD2.14 | length 26.4
  Top Layer w0.3: DD2.14 60.775,38.875 61.6,39.7 61.6,43.3 v1(60.5,44.4) ; DD1.9 59.924,61.325 60.5,60.749 v1(60.5,60.7)
  Mid-Layer 1 w0.3: v1(60.5,44.4) v1(60.5,60.7)
NetDD3_9: DD3.9 DD4.14 | length 27.9
  Top Layer w0.3: DD3.9 30.096,39.575 30.165,39.644 30.165,39.99 30.793,40.618 30.793,40.993 v1(30.8,41) ; DD4.14 35.975,60.379 36.1,60.254 v1(36.1,60.2)
  Mid-Layer 1 w0.3: v1(30.8,41) 33,43.2 33,49.3 33.9,50.2 34.524,50.2 35.6,51.276 35.6,51.9 33.9,53.6 33.9,58.949 35.151,60.2 v1(36.1,60.2)
NetDD5_9: DD5.9 DD6.14 | length 53.2
  Top Layer w0.3: v1(21.704,12.904) 21.796,12.996 DD6.14 ; v1(32.2,46.6) 33.7,46.6 35.425,48.325 DD5.9
  Mid-Layer 1 w0.3: v1(21.704,12.904) 29.704,12.904 30.9,14.1 30.9,30.4 28.1,33.2 28.1,39.2 32.2,43.3 v1(32.2,46.6)
NetDD7_9: DD7.9 DD8.14 | length 19.6
  Top Layer w0.3: DD7.9 4.525,52.775 v1(5.6,51.7) ; DD8.14 7.646,66.021 7.646,64.354 v1(8.2,63.8)
  Mid-Layer 1 w0.3: v1(5.6,51.7) 6.2,52.3 6.2,61.8 7.7,63.3 v1(8.2,63.8)
NetDD9_9: DD9.9 DD10.14 | length 14.4
  Top Layer w0.3: DD10.14 3.888,25.475 4.117,25.705 4.117,25.762 v1(4.156,25.8) ; v1(8.6,35.1) 8.625,35.125 DD9.9
  Mid-Layer 1 w0.3: v1(4.156,25.8) 4.188,25.8 4.667,26.279 4.879,26.279 6.4,27.8 6.4,32.9 v1(8.6,35.1)
NetHL1_1: HL1.1 R4.1 | length 2.6
  Top Layer w0.5: HL1.1 58.5,69 58.5,70.029 R4.1
NetHL1_2: HL1.2 R5.1 | length 2.1
  Top Layer w0.5: HL1.2 56.1,69.925 R5.1
NetHL1_4: HL1.4 R6.1 | length 2.1
  Top Layer w0.5: R6.1 53,68.462 53.3,68.162 HL1.4
NetHL2_1: HL2.1 R7.1 | length 2.5
  Top Layer w0.5: HL2.1 58.404,55.904 R7.1
NetHL2_2: HL2.2 R8.1 | length 2.2
  Top Layer w0.5: HL2.2 56.1,57.025 R8.1
NetHL2_4: HL2.4 R9.1 | length 2.2
  Top Layer w0.5: R9.1 53,55.462 53.3,55.162 HL2.4
NetHL3_1: HL3.1 R10.1 | length 2.5
  Top Layer w0.5: HL3.1 58.4,42.9 R10.1
NetHL3_2: HL3.2 R11.1 | length 2.2
  Top Layer w0.5: HL3.2 56.1,44.029 R11.1
NetHL3_4: HL3.4 R12.1 | length 2.2
  Top Layer w0.5: R12.1 53,42.462 53.3,42.162 HL3.4
NetHL4_1: HL4.1 R13.1 | length 2.5
  Top Layer w0.5: HL4.1 58.4,29.9 R13.1
NetHL4_2: HL4.2 R14.1 | length 2.2
  Top Layer w0.5: HL4.2 56.196,29.096 R14.1
NetHL4_4: HL4.4 R15.1 | length 2.2
  Top Layer w0.5: R15.1 53,29.462 53.3,29.162 HL4.4
NetHL5_1: HL5.1 R16.1 | length 2.7
  Top Layer w0.5: HL5.1 58.404,16.904 R16.1
NetHL5_2: HL5.2 R17.1 | length 2.4
  Top Layer w0.5: HL5.2 56.1,18.225 R17.1
NetHL5_4: HL5.4 R18.1 | length 2.4
  Top Layer w0.5: R18.1 53,16.462 53.3,16.162 HL5.4
NetHL6_1: HL6.1 R19.1 | length 2.7
  Top Layer w0.5: HL6.1 44.4,16.9 R19.1
NetHL6_2: HL6.2 R20.1 | length 2.4
  Top Layer w0.5: HL6.2 42.1,18.229 R20.1
NetHL6_4: HL6.4 R21.1 | length 2.4
  Top Layer w0.5: R21.1 39.1,16.362 39.3,16.162 HL6.4
NetHL7_1: HL7.1 R22.1 | length 2.6
  Top Layer w0.5: HL7.1 44.304,29.804 R22.1
NetHL7_2: HL7.2 R23.1 | length 2.2
  Top Layer w0.5: HL7.2 R23.1
NetHL7_4: HL7.4 R24.1 | length 2.3
  Top Layer w0.5: R24.1 39,29.462 39.3,29.162 HL7.4
NetHL8_1: HL8.1 R25.1 | length 2.6
  Top Layer w0.5: HL8.1 44.5,43 R25.1
NetHL8_2: HL8.2 R26.1 | length 2.3
  Top Layer w0.5: HL8.2 42.1,44.125 R26.1
NetHL8_4: HL8.4 R27.1 | length 2.4
  Top Layer w0.5: R27.1 38.9,42.562 39.3,42.162 HL8.4
NetHL9_1: HL9.1 R28.1 | length 2.7
  Top Layer w0.5: HL9.1 44.5,56 44.5,57.125 R28.1
NetHL9_2: HL9.2 R29.1 | length 2.3
  Top Layer w0.5: HL9.2 42.1,57.05 R29.1
NetHL9_4: HL9.4 R30.1 | length 2.4
  Top Layer w0.5: R30.1 38.9,55.562 39.3,55.162 HL9.4
NetHL10_1: HL10.1 R31.1 | length 2.7
  Top Layer w0.5: HL10.1 44.6,69.1 R31.1
NetHL10_2: HL10.2 R32.1 | length 2.4
  Top Layer w0.5: HL10.2 42.1,70 42.325,70.225 R32.1
NetHL10_4: HL10.4 R33.1 | length 2.4
  Top Layer w0.5: R33.1 39.075,70.225 39.3,70 HL10.4
NetHL11_1: HL11.1 R34.1 | length 2.6
  Top Layer w0.5: HL11.1 30.404,68.904 R34.1
NetHL11_2: HL11.2 R35.1 | length 2.3
  Top Layer w0.5: HL11.2 28.1,70.125 R35.1
NetHL11_4: HL11.4 R36.1 | length 2.3
  Top Layer w0.5: R36.1 25.3,70.025 HL11.4
NetHL12_1: HL12.1 R37.1 | length 2.6
  Top Layer w0.5: HL12.1 30.404,55.904 R37.1
NetHL12_2: HL12.2 R38.1 | length 2.3
  Top Layer w0.5: HL12.2 28.1,57.125 R38.1
NetHL12_4: HL12.4 R39.1 | length 2.4
  Top Layer w0.5: R39.1 25.075,57.225 25.3,57 HL12.4
NetHL13_1: HL13.1 R40.1 | length 2.7
  Top Layer w0.5: HL13.1 30.5,43 R40.1
NetHL13_2: HL13.2 R41.1 | length 2.4
  Top Layer w0.5: HL13.2 28.1,44.129 R41.1
NetHL13_4: HL13.4 R42.1 | length 2.4
  Top Layer w0.5: R42.1 25,42.462 25.3,42.162 HL13.4
NetHL14_1: HL14.1 R43.1 | length 2.6
  Top Layer w0.5: HL14.1 30.5,30 R43.1
NetHL14_2: HL14.2 R44.1 | length 2.3
  Top Layer w0.5: HL14.2 28.1,31.029 R44.1
NetHL14_4: HL14.4 R45.1 | length 2.3
  Top Layer w0.5: R45.1 25.075,31.125 25.3,30.9 HL14.4
NetHL15_1: HL15.1 R46.1 | length 2.7
  Top Layer w0.5: HL15.1 30.5,17 R46.1
NetHL15_2: HL15.2 R47.1 | length 2.4
  Top Layer w0.5: HL15.2 28.2,16.1 R47.1
NetHL15_4: HL15.4 R48.1 | length 2.4
  Top Layer w0.5: R48.1 25.1,16.362 25.3,16.162 HL15.4
NetHL16_1: HL16.1 R49.1 | length 2.7
  Top Layer w0.5: HL16.1 16.4,16.9 R49.1
NetHL16_2: HL16.2 R50.1 | length 2.4
  Top Layer w0.5: HL16.2 14.196,16.096 R50.1
NetHL16_4: HL16.4 R51.1 | length 2.4
  Top Layer w0.5: R51.1 11,16.462 11.3,16.162 HL16.4
NetHL17_1: HL17.1 R52.1 | length 2.7
  Top Layer w0.5: HL17.1 16.5,30 R52.1
NetHL17_2: HL17.2 R53.1 | length 2.4
  Top Layer w0.5: HL17.2 14.1,31.129 R53.1
NetHL17_4: HL17.4 R54.1 | length 2.5
  Top Layer w0.5: R54.1 11.075,31.325 11.3,31.1 HL17.4
NetHL18_1: HL18.1 R55.1 | length 2.5
  Top Layer w0.5: HL18.1 16.5,43 R55.1
NetHL18_2: HL18.2 R56.1 | length 2.2
  Top Layer w0.5: HL18.2 14.1,43.954 R56.1
NetHL18_4: HL18.4 R57.1 | length 2.3
  Top Layer w0.5: R57.1 11.1,42.593 11.185,42.508 11.185,42.115 HL18.4
NetHL19_1: HL19.1 R58.1 | length 2.6
  Top Layer w0.5: HL19.1 16.5,56 R58.1
NetHL19_2: HL19.2 R59.1 | length 2.3
  Top Layer w0.5: HL19.2 14.1,57.029 R59.1
NetHL19_4: HL19.4 R60.1 | length 2.3
  Top Layer w0.5: R60.1 11.3,57.025 HL19.4
NetHL20_1: HL20.1 R61.1 | length 2.5
  Top Layer w0.5: HL20.1 16.5,69 R61.1
NetHL20_2: HL20.2 R62.1 | length 2.2
  Top Layer w0.5: HL20.2 14.1,69.929 R62.1
NetHL20_4: HL20.4 R63.1 | length 2.2
  Top Layer w0.5: R63.1 11.3,69.925 HL20.4
NetHL21_1: HL21.1 R64.1 | length 2.6
  Top Layer w0.5: HL21.1 2.3,68.8 R64.1
NetHL21_2: HL21.2 R65.1 | length 2.2
  Top Layer w0.5: R65.1 0.1,70.221 HL21.2
NetHL21_4: HL21.4 R66.1 | length 2.3
  Top Layer w0.5: R66.1 -2.7,70.025 HL21.4
NetHL22_1: HL22.1 R67.1 | length 2.6
  Top Layer w0.5: HL22.1 2.3,55.8 R67.1
NetHL22_2: HL22.2 R68.1 | length 2.2
  Top Layer w0.5: R68.1 0.1,57.221 HL22.2
NetHL22_4: HL22.4 R69.1 | length 2.5
  Top Layer w0.5: R69.1 -3.3,55.6 HL22.4
NetHL23_1: HL23.1 R70.1 | length 2.6
  Top Layer w0.5: HL23.1 2.4,42.9 R70.1
NetHL23_2: HL23.2 R71.1 | length 2.3
  Top Layer w0.5: HL23.2 0.1,44.129 R71.1
NetHL23_4: HL23.4 R72.1 | length 2.3
  Top Layer w0.5: R72.1 -2.8,42.1 HL23.4
NetHL24_1: HL24.1 R73.1 | length 2.6
  Top Layer w0.5: HL24.1 2.4,29.9 R73.1
NetHL24_2: HL24.2 R74.1 | length 2.3
  Top Layer w0.5: HL24.2 0.1,31.129 R74.1
NetHL24_4: HL24.4 R75.1 | length 2.3
  Top Layer w0.5: R75.1 -2.9,29.362 -2.7,29.162 HL24.4
NetHL25_1: HL25.1 R76.1 | length 2.6
  Top Layer w0.5: HL25.1 2.4,16.9 R76.1
NetHL25_2: HL25.2 R77.1 | length 2.3
  Top Layer w0.5: HL25.2 0.1,18.129 R77.1
NetHL25_4: HL25.4 R78.1 | length 2.3
  Top Layer w0.5: R78.1 -2.9,16.593 -2.815,16.508 -2.815,16.115 HL25.4
SR0: DD1.15 R4.2 | length 11.8
  Top Layer w0.3: R4.2 58.629,72.075 58.954,72.4 58.954,72.625 59.371,73.041 v1(59.371,73.1) ; DD1.15 60.271,65.225 60.278,65.232 60.668,65.232 v1(60.7,65.2)
  Mid-Layer 1 w0.3: v1(59.371,73.1) 60.7,71.771 v1(60.7,65.2)
SR1: DD1.1 R5.2 | length 11.7
  Top Layer w0.3: v1(52,66.4) 52.45,65.95 52.459,65.95 52.509,65.9 53.025,65.9 DD1.1 ; R5.2 v1(56.2,73.3)
  Mid-Layer 1 w0.3: v1(52,66.4) 52,69.9 55.4,73.3 v1(56.2,73.3)
SR2: DD1.2 R6.2 | length 11.3
  Top Layer w0.3: v1(51.3,65.9) 51.975,65.225 DD1.2 ; R6.2 v1(53,73.2)
  Mid-Layer 1 w0.3: v1(51.3,65.9) 51.3,71.5 v1(53,73.2)
SR3: DD1.3 R7.2 | length 8.6
  Top Layer w0.3: DD1.3 54.325,64.575 56.8,62.1 56.8,60.679 57.854,59.625 57.854,59.4 58.179,59.075 R7.2
SR4: DD1.4 R8.2 | length 6.8
  Top Layer w0.3: DD1.4 54.175,63.925 56.2,61.9 R8.2
SR5: DD1.5 R9.2 | length 7.3
  Top Layer w0.3: R9.2 53.975,59.075 55.4,60.5 55.4,61.8 53.925,63.275 DD1.5
SR6: DD1.6 R10.2 | length 22.3
  Top Layer w0.3: v1(51.025,62.663) 51.044,62.644 53.031,62.644 DD1.6 ; v1(58.3,47.3) 58.3,46.175 R10.2
  Mid-Layer 1 w0.3: v1(51.025,62.663) 51.025,62.625 51.3,62.35 51.3,53.2 57.2,47.3 v1(58.3,47.3)
SR7: DD1.7 R11.2 | length 20.6
  Top Layer w0.3: v1(50.7,62) 50.725,61.975 DD1.7 ; R11.2 56.2,46.079 v1(56.2,47.3)
  Mid-Layer 1 w0.3: v1(50.7,62) 50.7,52.8 v1(56.2,47.3)
SR8: DD2.15 R12.2 | length 16.8
  Top Layer w0.3: v1(51.4,46) 51.475,46.075 R12.2 ; DD2.15 58.862,39.512 59.977,39.512 v1(60.5,40.035)
  Mid-Layer 1 w0.3: v1(51.4,46) 52.7,44.7 58.7,44.7 60.6,42.8 60.6,40.189 60.5,40.089 v1(60.5,40.035)
SR9: DD2.1 R13.2 | length 11.7
  Top Layer w0.3: v1(51.6,40.2) 51.625,40.175 DD2.1 ; R13.2@58.2,33.275 v1(58.2,34.2)
  Top Layer w0.5: R13.2@58.2,33.275 R13.2
  Mid-Layer 1 w0.3: v1(51.6,40.2) 52.2,40.2 v1(58.2,34.2)
SR10: DD2.2 R14.2 | length 11.1
  Top Layer w0.3: v1(51.1,39.5) 52.925,39.5 DD2.2 ; R14.2 56.261,33.14 56.261,34.007 56.674,34.42 v1(56.674,34.474)
  Mid-Layer 1 w0.3: v1(51.1,39.5) 51.649,39.5 v1(56.674,34.474)
SR11: DD2.3 R15.2 | length 9.1
  Top Layer w0.3: v1(50.7,38.9) 51.576,38.9 51.601,38.875 DD2.3 ; v1(52.9,34.1) 52.9,34.046 53.034,33.912 53.034,33.109 R15.2
  Mid-Layer 1 w0.3: v1(50.7,38.9) 50.7,36.3 v1(52.9,34.1)
SR12: DD2.4 R16.2 | length 24.8
  Top Layer w0.3: v1(51.3,38.3) 51.354,38.3 51.429,38.225 DD2.4 ; v1(58.4,21.4) 58.404,21.396 R16.2
  Mid-Layer 1 w0.3: v1(51.3,38.3) 52,38.3 57.1,33.2 57.7,33.2 60.1,30.8 60.1,23.1 v1(58.4,21.4)
SR13: DD2.5 R17.2 | length 24.5
  Top Layer w0.3: v1(51.3,37.6) 51.325,37.575 DD2.5 ; R17.2 v1(56.2,21.4)
  Mid-Layer 1 w0.3: v1(51.3,37.6) 51.993,37.6 56.893,32.7 57.4,32.7 59.6,30.5 59.6,24.8 v1(56.2,21.4)
SR14: DD2.6 R18.2 | length 25.7
  Top Layer w0.3: v1(51.3,36.9) 52.925,36.9 DD2.6 ; R18.2 53,21.2 v1(53.3,21.5)
  Mid-Layer 1 w0.3: v1(51.3,36.9) 51.9,36.9 59.1,29.7 59.1,25.1 56.1,22.1 53.9,22.1 v1(53.3,21.5)
SR15: DD2.7 R19.2 | length 21.4
  Top Layer w0.3: R19.2 v1(44.4,21.3) ; v1(49.9,36.3) 49.925,36.275 DD2.7
  Mid-Layer 1 w0.3: v1(44.4,21.3) 49.9,26.8 v1(49.9,36.3)
SR16: DD3.15 R20.2 | length 25
  Top Layer w0.3: DD3.15 31.375,35.675 v1(31.4,35.7) ; v1(41.8,21.2) 41.976,21.024 41.976,20.495 R20.2
  Mid-Layer 1 w0.3: v1(31.4,35.7) 32.8,35.7 35,33.5 35,23.6 37.4,21.2 v1(41.8,21.2)
SR17: DD3.1 R21.2 | length 16.3
  Top Layer w0.3: v1(35.6,34.3) 35.6,34.975 DD3.1 ; v1(37.8,21.9) 38.676,21.024 38.676,20.6 39.001,20.275 R21.2
  Mid-Layer 1 w0.3: v1(35.6,34.3) 35.6,24.1 v1(37.8,21.9)
SR18: DD3.2 R22.2 | length 11.8
  Top Layer w0.3: DD3.2 35.679,35.646 36.317,35.646 36.525,35.439 36.888,35.439 v1(36.927,35.401) ; v1(44.1,34.5) 44.1,33.379 R22.2
  Mid-Layer 1 w0.3: v1(36.927,35.401) 38.1,34.227 38.1,33.744 38.744,33.1 42.7,33.1 v1(44.1,34.5)
SR19: DD3.3 R23.2 | length 9.7
  Top Layer w0.3: DD3.3 36.632,36.325 36.857,36.1 v1(36.9,36.1) ; R23.2 v1(42.1,34.5)
  Mid-Layer 1 w0.3: v1(36.9,36.1) 36.938,36.062 37.138,36.062 38.6,34.6 38.6,33.951 38.951,33.6 41.2,33.6 v1(42.1,34.5)
SR20: DD3.4 R24.2 | length 6.2
  Top Layer w0.3: DD3.4 37.073,36.975 v1(37.949,36.1) ; R24.2 39,33.946 39.2,34.146 v1(39.2,34.2)
  Mid-Layer 1 w0.3: v1(37.949,36.1) 39.162,34.887 39.162,34.238 v1(39.2,34.2)
SR21: DD3.5 R25.2 | length 18.2
  Top Layer w0.3: DD3.5 37.349,37.625 37.684,37.961 37.684,38.007 38.023,38.346 v1(38.023,38.4) ; v1(44.2,47.3) 44.5,47 R25.2
  Mid-Layer 1 w0.3: v1(38.023,38.4) 37.985,38.438 37.985,39.015 37,40 37,43.3 40,46.3 43.2,46.3 v1(44.2,47.3)
SR22: DD3.6 R26.2 | length 14.8
  Top Layer w0.3: DD3.6 35.679,38.304 36.673,38.304 36.769,38.4 v1(36.823,38.4) ; R26.2 v1(42.2,47.1)
  Mid-Layer 1 w0.3: v1(36.823,38.4) 36.823,38.454 36.5,38.778 36.5,43.8 39.8,47.1 v1(42.2,47.1)
SR23: DD3.7 R27.2 | length 14.4
  Top Layer w0.3: DD3.7 35.679,38.954 36.529,38.954 36.575,39 37.079,39 v1(37.115,39.036) ; v1(37.6,46.2) 37.625,46.175 R27.2
  Mid-Layer 1 w0.3: v1(37.115,39.036) 37.115,38.982 37.423,38.674 37.423,38.074 37.024,37.675 36.575,37.675 36,38.25 36,44.6 v1(37.6,46.2)
SR24: DD4.15 R30.2 | length 4.2
  Top Layer w0.3: DD4.15 36.625,61.075 38.2,59.5 38.575,59.5 R30.2
SR25: DD4.1 R28.2 | length 12
  Top Layer w0.3: DD4.1 37.304,68.092 37.304,67.496 v1(38,66.8) ; v1(44.5,60.3) 44.5,60.246 44.6,60.146 R28.2
  Mid-Layer 1 w0.3: v1(38,66.8) v1(44.5,60.3)
SR26: DD4.2 R29.2 | length 11.4
  Top Layer w0.3: DD4.2 36.643,68.103 36.643,67.309 v1(37.276,66.676) ; R29.2 42.5,59.4 v1(42.5,60.3)
  Mid-Layer 1 w0.3: v1(37.276,66.676) 42.5,61.451 v1(42.5,60.3)
SR27: DD4.3 R33.2 | length 6.2
  Top Layer w0.3: DD4.3 35.975,70.675 37.475,72.175 R33.2
SR28: DD4.4 R32.2 | length 11.5
  Top Layer w0.3: DD4.4 35.325,71.018 37.407,73.1 41.758,73.1 41.934,72.924 41.934,72.5 42.259,72.175 R32.2
SR29: DD4.5 R31.2 | length 14.7
  Top Layer w0.3: DD4.5 34.675,71.075 37.3,73.7 43.075,73.7 44.05,72.725 44.05,72.5 44.375,72.175 R31.2
SR30: DD4.6 R35.2 | length 10.7
  Top Layer w0.3: R35.2 28.368,72.175 28.693,72.5 28.693,72.893 29,73.2 32.6,73.2 34.025,71.775 DD4.6
SR31: DD4.7 R34.2 | length 6.6
  Top Layer w0.3: R34.2 30.429,72.2 32.6,72.2 33.375,71.425 DD4.7
SR32: DD5.15 R36.2 | length 29.8
  Top Layer w0.3: R36.2 26.225,72.175 v1(26.7,71.7) ; DD5.15 38.175,52.2 v1(39.8,52.2)
  Mid-Layer 1 w0.3: v1(26.7,71.7) 29.2,71.7 37.9,63 37.9,54.1 v1(39.8,52.2)
SR33: DD5.1 R37.2 | length 7.7
  Top Layer w0.3: R37.2 31.425,59.175 v1(31.8,58.8) ; DD5.1 32.25,53.996 32.35,54.096 v1(32.35,54.15)
  Mid-Layer 1 w0.3: v1(31.8,58.8) 32.35,58.25 v1(32.35,54.15)
SR34: DD5.2 R38.2 | length 10.3
  Top Layer w0.3: R38.2 28.425,59.175 28.75,58.85 28.75,58.75 v1(29.3,58.2) ; v1(31.624,53.776) 31.2,53.351 31.2,52.429 31.376,52.254 32.221,52.254 DD5.2
  Mid-Layer 1 w0.3: v1(29.3,58.2) 30.4,58.2 31.624,56.976 v1(31.624,53.776)
SR35: DD5.3 R39.2 | length 13.5
  Top Layer w0.3: R39.2 25.325,58.85 26.396,58.85 26.546,58.7 v1(26.6,58.7) ; v1(30.8,53.8) 30.8,53.746 30.6,53.546 30.6,52.2 31.196,51.604 32.221,51.604 DD5.3
  Mid-Layer 1 w0.3: v1(26.6,58.7) 27.8,57.5 30.393,57.5 30.8,57.093 v1(30.8,53.8)
SR36: DD5.4 R40.2 | length 6.7
  Top Layer w0.3: R40.2 v1(30.5,47.2) ; v1(30.8,51) 30.854,51 30.929,50.925 DD5.4
  Mid-Layer 1 w0.3: v1(30.5,47.2) 30.5,48.8 31.2,49.5 31.2,50.6 v1(30.8,51)
SR37: DD5.5 R41.2 | length 6.7
  Top Layer w0.3: R41.2 28.296,47.304 28.3,47.309 v1(28.3,47.4) ; v1(30.5,50.325) 30.538,50.287 30.668,50.287 30.679,50.275 DD5.5
  Mid-Layer 1 w0.3: v1(28.3,47.4) 30.5,49.6 v1(30.5,50.325)
SR38: DD5.6 R42.2 | length 10
  Top Layer w0.3: v1(25,47.5) R42.2 R42.2@25.268,46.543 ; v1(29.9,49.964) 29.954,49.964 30.294,49.625 DD5.6
  Mid-Layer 1 w0.3: v1(25,47.5) 27.382,47.5 29.846,49.964 v1(29.9,49.964)
SR39: DD5.7 R43.2 | length 19.8
  Top Layer w0.3: R43.2 30.724,33.399 30.724,33.924 31.062,34.262 31.162,34.262 v1(31.2,34.3) ; DD5.7 v1(33.775,48.975)
  Mid-Layer 1 w0.3: v1(31.2,34.3) 29.9,35.6 29.9,37.8 33.775,41.675 v1(33.775,48.975)
SR40: DD6.15 R44.2 | length 23.7
  Top Layer w0.3: DD6.15 22.446,15.903 22.5,15.957 v1(22.5,16.011) ; v1(26.9,32.9) 27.175,33.175 R44.2
  Mid-Layer 1 w0.3: v1(22.5,16.011) 22.5,17.647 23.576,18.724 23.576,19.249 22.8,20.025 22.8,30.7 24.7,32.6 26.6,32.6 v1(26.9,32.9)
SR41: DD6.1 R45.2 | length 17.8
  Top Layer w0.3: v1(22.976,19) 22.976,19.054 23.096,19.173 DD6.1 ; v1(23.6,33.1) 23.625,33.075 R45.2
  Mid-Layer 1 w0.3: v1(22.976,19) 22.922,19 22.822,19.1 22.8,19.1 22.1,19.8 22.1,31.6 v1(23.6,33.1)
SR42: DD6.2 R46.2 | length 11.2
  Top Layer w0.3: DD6.2 22.446,21.246 22.9,21.7 25.8,21.7 27.15,20.35 27.15,19.476 27.326,19.3 29.4,19.3 29.95,19.85 29.95,19.95 30.275,20.275 R46.2
SR43: DD6.3 R47.2 | length 8.9
  Top Layer w0.3: DD6.3 21.796,21.496 22.5,22.2 26.275,22.2 27.65,20.825 27.65,20.6 27.975,20.275 R47.2
SR44: DD6.4 R48.2 | length 6.4
  Top Layer w0.3: DD6.4 21.146,18.954 21.7,18.4 23.225,18.4 24.55,19.725 24.55,19.95 24.875,20.275 R48.2
SR45: DD6.5 R51.2 | length 12.2
  Top Layer w0.3: R51.2 11.225,20.275 11.55,20.6 11.55,20.825 13.225,22.5 19.5,22.5 20.496,21.504 DD6.5
SR46: DD6.6 R50.2 | length 8
  Top Layer w0.3: R50.2 14.424,20.504 14.424,21.024 15.4,22 19.1,22 19.846,21.254 DD6.6
SR47: DD6.7 R49.2 | length 4.5
  Top Layer w0.3: R49.2 16.625,20.275 16.95,20.6 16.95,20.825 17.625,21.5 18.8,21.5 19.196,21.104 DD6.7
SR48: DD7.15 R52.2 | length 25.3
  Top Layer w0.3: DD7.15 3.819,48.875 3.97,48.724 v1(4.024,48.724) ; v1(15.2,34.8) 15.95,34.05 15.95,33.6 16.275,33.275 R52.2
  Mid-Layer 1 w0.3: v1(4.024,48.724) 4.6,49.3 6.4,49.3 7.049,49.3 7.7,48.649 7.7,42.3 v1(15.2,34.8)
SR49: DD7.1 R53.2 | length 19.9
  Top Layer w0.3: DD7.1 8.05,48.206 8.1,48.156 8.1,47.5 v1(8.4,47.2) ; R53.2 14.455,33.434 v1(14.455,34.255)
  Mid-Layer 1 w0.3: v1(8.4,47.2) 8.4,42.5 16,34.9 16,34.4 15.7,34.1 14.664,34.1 14.509,34.255 v1(14.455,34.255)
SR50: DD7.2 R54.2 | length 22.3
  Top Layer w0.3: v1(6.674,48.7) 6.728,48.7 6.9,48.872 8.047,48.872 DD7.2 ; R54.2 11.199,33.474 11.974,33.474 13.387,34.887 14.187,34.887 v1(14.226,34.926)
  Mid-Layer 1 w0.3: v1(6.674,48.7) 7.1,48.274 7.1,42.051 v1(14.226,34.926)
SR51: DD7.3 R55.2 | length 11.2
  Top Layer w0.3: DD7.3 8.063,49.513 9.711,49.513 10.125,49.927 10.125,49.948 10.336,50.159 v1(10.336,50.213) ; R55.2 v1(16.5,47.2)
  Mid-Layer 1 w0.3: v1(10.336,50.213) 12.749,47.8 15.9,47.8 v1(16.5,47.2)
SR52: DD7.4 R56.2 | length 8.5
  Top Layer w0.3: DD7.4 v1(9.525,50.175) ; v1(14.2,47.1) 14.2,47.046 14.296,46.95 R56.2
  Mid-Layer 1 w0.3: v1(9.525,50.175) 12.6,47.1 v1(14.2,47.1)
SR53: DD7.5 R57.2 | length 8.3
  Top Layer w0.3: DD7.5 8.063,50.813 9.887,50.813 v1(9.9,50.8) ; R57.2 11.3,46.375 v1(11.3,47.3)
  Mid-Layer 1 w0.3: v1(9.9,50.8) 9.875,50.775 9.276,50.775 8.925,50.424 8.925,49.675 v1(11.3,47.3)
SR54: DD7.6 R58.2 | length 15.3
  Top Layer w0.3: DD7.6 9.575,51.475 v1(9.6,51.5) ; R58.2 v1(16.5,60.3)
  Mid-Layer 1 w0.3: v1(9.6,51.5) 10.4,52.3 10.4,55.9 14.1,59.6 15.8,59.6 v1(16.5,60.3)
SR55: DD7.7 R59.2 | length 12.7
  Top Layer w0.3: DD7.7 9.325,52.125 v1(9.5,52.3) ; v1(14.2,60.3) 14.2,60.246 14.296,60.15 R59.2
  Mid-Layer 1 w0.3: v1(9.5,52.3) 9.9,52.7 9.9,56.107 14.093,60.3 v1(14.2,60.3)
SR56: DD8.15 R60.2 | length 8.5
  Top Layer w0.3: DD8.15 8.325,64.875 8.7,64.5 v1(9.5,64.5) ; R60.2 v1(11.1,60.3)
  Mid-Layer 1 w0.3: v1(9.5,64.5) 9.5,61.9 v1(11.1,60.3)
SR57: DD8.1 R63.2 | length 3.7
  Top Layer w0.3: DD8.1 8.975,72.466 9.05,72.541 9.05,72.55 9.5,73 10.9,73 11.076,72.824 11.076,72.099 R63.2
SR58: DD8.2 R62.2 | length 7.8
  Top Layer w0.3: DD8.2 8.354,71.979 8.354,72.746 9.107,73.5 12.871,73.5 13.746,72.625 13.746,72.4 14.071,72.075 R62.2
SR59: DD8.3 R61.2 | length 11.5
  Top Layer w0.3: DD8.3 7.677,71.953 7.677,72.777 8.9,74 15.5,74 16.5,73 R61.2
SR60: DD8.4 R66.2 | length 12.9
  Top Layer w0.3: R66.2 -2.676,72.399 -2.676,72.924 -1.2,74.4 5.907,74.4 6.95,73.357 6.95,72.541 7.025,72.466 DD8.4
SR61: DD8.5 R65.2 | length 8.9
  Top Layer w0.3: R65.2 0.324,72.404 0.324,72.924 1.3,73.9 5.7,73.9 6.375,73.225 DD8.5
SR62: DD8.6 R64.2 | length 5.3
  Top Layer w0.3: R64.2 2.525,72.175 2.85,72.5 2.85,72.725 3.525,73.4 5.3,73.4 5.725,72.975 DD8.6
SR63: DD8.7 R67.2 | length 13.9
  Top Layer w0.3: R67.2 2.5,59.375 v1(2.5,60.4) ; v1(4.9,70.7) 5.075,70.875 DD8.7
  Mid-Layer 1 w0.3: v1(2.5,60.4) 2.5,68.3 v1(4.9,70.7)
SR64: DD9.15 R68.2 | length 33.2
  Top Layer w0.3: R68.2 0.096,60.396 v1(0.1,60.4) ; v1(7.7,39) 7.725,39.025 DD9.15
  Mid-Layer 1 w0.3: v1(0.1,60.4) -1.7,60.4 -4.5,57.6 -4.5,51.2 v1(7.7,39)
SR65: DD9.1 R69.2 | length 26.2
  Top Layer w0.3: v1(-5,59.2) -3.325,59.2 R69.2 ; v1(2.5,39.7) 2.525,39.675 DD9.1
  Mid-Layer 1 w0.3: v1(-5,59.2) -5,50.993 2.5,43.493 v1(2.5,39.7)
SR66: DD9.2 R70.2 | length 10.2
  Top Layer w0.3: R70.2 3.425,46.175 4,45.6 4,42.7 5.6,41.1 5.6,39.201 5.424,39.025 DD9.2
SR67: DD9.3 R71.2 | length 17.5
  Top Layer w0.3: v1(-1.3,46.4) -0.029,46.4 R71.2 ; v1(1.874,38.4) 1.899,38.375 DD9.3
  Mid-Layer 1 w0.3: v1(-1.3,46.4) -4.1,43.6 -4.1,41.3 -1.175,38.375 1.849,38.375 v1(1.874,38.4)
SR68: DD9.4 R72.2 | length 18.6
  Top Layer w0.3: R72.2 v1(-2.8,47.4) ; v1(1.9,37.7) 1.925,37.725 DD9.4
  Mid-Layer 1 w0.3: v1(-2.8,47.4) -4.6,45.6 -4.6,41.093 -1.207,37.7 v1(1.9,37.7)
SR69: DD9.5 R73.2 | length 5.5
  Top Layer w0.3: R73.2 v1(2.4,34.1) ; v1(3,37.1) 3.025,37.075 DD9.5
  Mid-Layer 1 w0.3: v1(2.4,34.1) 3,34.7 v1(3,37.1)
SR70: DD9.6 R74.2 | length 7
  Top Layer w0.3: R74.2 0.2,33.179 v1(0.2,34.2) ; v1(2.4,36.5) 2.454,36.5 2.529,36.425 DD9.6
  Mid-Layer 1 w0.3: v1(0.2,34.2) 1.5,34.2 2.4,35.1 v1(2.4,36.5)
SR71: DD9.7 R75.2 | length 9.1
  Top Layer w0.3: R75.2 -2.9,34.4 v1(-2.881,34.419) ; v1(1.8,35.8) 1.825,35.775 DD9.7
  Mid-Layer 1 w0.3: v1(-2.881,34.419) -1.5,35.8 v1(1.8,35.8)
SR72: DD10.15 R76.2 | length 9.2
  Top Layer w0.3: v1(1,21.8) 1.907,20.893 1.907,20.5 2.232,20.175 R76.2 ; v1(1.1,26.1) 1.125,26.125 DD10.15
  Mid-Layer 1 w0.3: v1(1,21.8) 0.1,22.7 0.1,25.1 v1(1.1,26.1)
SR73: DD10.1 R77.2 | length 12.1
  Top Layer w0.3: v1(-4.6,26.8) -3.075,26.8 DD10.1 ; v1(-1.5,21.2) -0.8,20.5 -0.129,20.5 R77.2
  Mid-Layer 1 w0.3: v1(-4.6,26.8) -4.6,21.7 -4.1,21.2 v1(-1.5,21.2)
SR74: DD10.2 R78.2 | length 10.1
  Top Layer w0.3: v1(-5.362,26.162) -5.325,26.125 DD10.2 ; v1(-4.2,20.2) -4.175,20.175 R78.2
  Mid-Layer 1 w0.3: v1(-5.362,26.162) -5.362,21.362 v1(-4.2,20.2)
SR_DS: DD1.14 R1.2 XP1.3 XP1.8 | length 58.8
  Top Layer w0.3: v1(57.3,64.6) 57.325,64.575 DD1.14
  Top Layer w0.5: R1.2 22.63,77.2 XP1.3
  Mid-Layer 1 w0.3: XP1.8 32.87,84.9 46.4,84.9 59,72.3 59,66.3 v1(57.3,64.6)
  Bottom Layer w0.5: XP1.3 26.73,81.3 29.27,81.3 XP1.8
SR_DS1: DD2.9 DD3.14 | length 30.8
  Top Layer w0.3: DD3.14 31.571,36.325 31.646,36.4 v1(31.7,36.4) ; v1(57.5,35.9) 57.775,35.625 DD2.9
  Mid-Layer 2 w0.3: v1(31.7,36.4) 32,36.7 46.393,36.7 48.493,34.6 51.707,34.6 53.007,35.9 v1(57.5,35.9)
SR_DS2: DD4.9 DD5.14 | length 14.9
  Top Layer w0.3: v1(32.526,60.826) 32.526,60.88 32.725,61.079 DD4.9 ; v1(34.876,51.776) 34.93,51.776 35.131,51.575 DD5.14
  Mid-Layer 1 w0.3: v1(32.526,60.826) 32.526,60.784 33,60.31 33,53.651 v1(34.876,51.776)
SR_DS3: DD6.9 DD7.14 | length 54
  Top Layer w0.3: DD7.14 2.159,49.516 3.95,49.516 v1(3.959,49.507) ; v1(18.5,12.9) 18.546,12.946 DD6.9
  Mid-Layer 1 w0.3: v1(3.959,49.507) 3.4,48.949 3.4,48.5 6.6,45.3 6.6,41.807 9.9,38.507 9.9,35 7.5,32.6 7.5,23.7 11.3,19.9 16.407,19.9 19.507,16.8 20.4,16.8 21.1,16.1 21.1,15.493 20.307,14.7 20.3,14.7 v1(18.5,12.9)
SR_DS4: DD8.9 DD9.14 | length 39.5
  Top Layer w0.3: v1(3.8,64.3) 4.425,64.925 DD8.9 ; DD9.14 11.175,38.375 v1(12.6,39.8)
  Mid-Layer 1 w0.3: v1(3.8,64.3) 5.2,65.7 7.6,65.7 8.9,64.4 8.9,63.1 6.8,61 6.8,50.4 9,48.2 9,42.607 11.807,39.8 v1(12.6,39.8)
SR_SHCP: DD1.11 DD2.11 DD3.11 DD4.11 DD5.11 DD6.11 DD7.11 DD8.11 DD9.11 DD10.11 R2.2 XP1.2 XP1.9 | length 251.7
  Top Layer w0.3: DD7.11 3.375,51.475 v1(4,52.1) ; DD10.11 4.275,23.525 5.078,22.722 5.478,22.722 v1(5.5,22.7) ; v1(5.1,64.2) 5.725,64.825 DD8.11 ; v1(8.6,36.3) 8.725,36.425 DD9.11 ; v1(19.8,15.9) 19.8,15.846 19.846,15.8 DD6.11 ; DD3.11 31.275,38.275 v1(31.5,38.5) ; v1(34,64.3) 34.025,64.275 DD4.11 ; v1(36.1,49.6) 36.125,49.625 DD5.11 ; v1(57.286,37.08) 57.32,37.08 57.475,36.925 DD2.11 ; DD1.11 60.775,62.625 61.162,62.238 61.162,61.838 v1(61.2,61.8)
  Top Layer w0.5: R2.2 22.279,82.2 22.649,82.57 XP1.2
  Mid-Layer 1 w0.3: v1(5.1,64.2) 5.1,53.2 v1(4,52.1) 2.9,51 2.9,47.8 5.6,45.1 5.6,42.1 9.4,38.3 9.4,37.1 5.9,33.6 5.9,28.393 3.5,25.993 3.5,25.2 4.3,24.4 5.3,24.4 5.9,23.8 5.9,23.4 5.538,23.038 5.538,22.738 v1(5.5,22.7) 5.5,22.3 8.4,19.4 16.2,19.4 19.6,16 19.646,16 19.746,15.9 v1(19.8,15.9) ; v1(31.5,38.5) 34.5,41.5 34.5,48 v1(36.1,49.6) 36.1,52.693 35.1,53.693 35.1,58.749 35.451,59.1 36.1,59.1 36.8,59.8 36.8,61.5 v1(34,64.3) 34,65.8 29,70.8 26,70.8 25,71.8 25,72.5 28,75.5 30.6,75.5 33.08,77.98 XP1.9 ; v1(57.286,37.08) 57.232,37.08 57.132,37.18 57.12,37.18 56.7,37.6 56.7,38.3 57.3,38.9 60.4,38.9 61.2,39.7 v1(61.2,61.8)
  Mid-Layer 1 w0.5: XP1.2 22.93,82.57 24.2,81.3 31.81,81.3 XP1.9
  Mid-Layer 2 w0.3: v1(4,52.1) 5.2,53.3 28.9,53.3 30.1,52.1 33.6,52.1 v1(36.1,49.6) ; v1(31.5,38.5) 31,38 31,37.6 31.4,37.2 46.6,37.2 48.7,35.1 51.5,35.1 53.48,37.08 v1(57.286,37.08)
SR_STCP: DD1.12 DD2.12 DD3.12 DD4.12 DD5.12 DD6.12 DD7.12 DD8.12 DD9.12 DD10.12 R3.2 XP1.1 XP1.10 | length 242.1
  Top Layer w0.3: DD7.12 3.824,50.825 v1(4.1,51.1) ; DD10.12 4.636,24.175 5.111,23.7 v1(5.151,23.7) ; v1(6.272,64.428) 6.272,64.482 6.375,64.585 DD8.12 ; v1(8.4,37.1) 10.225,37.1 DD9.12 ; DD6.12 20.497,14.352 20.497,15.852 v1(20.498,15.853) ; DD3.12 29.775,37.6 31.646,37.6 31.846,37.8 v1(31.9,37.8) ; DD4.12 34.675,59.125 35.3,58.5 v1(35.7,58.5) ; v1(36.8,50.3) 36.825,50.275 DD5.12 ; v1(57.3,37.921) 57.333,37.921 57.679,37.575 DD2.12 ; DD1.12 61.025,63.275 v1(61.3,63)
  Top Layer w0.5: R3.2 22.59,79.7 XP1.1
  Mid-Layer 1 w0.3: v1(4.1,51.1) 5.7,52.7 5.7,63.856 v1(6.272,64.428) ; v1(5.151,23.7) 4.1,23.7 ; v1(8.4,37.1) 5.4,34.1 5.4,28.8 2.9,26.3 2.9,24.9 4.1,23.7 ; v1(20.498,15.853) 20.462,15.816 20.462,15.562 20.1,15.2 19.493,15.2 15.793,18.9 8.1,18.9 4.1,22.9 4.1,23.7 ; v1(31.9,37.8) 35,40.9 35,46.2 36.8,48 v1(36.8,50.3) 36.8,52.7 35.7,53.8 v1(35.7,58.5) ; v1(57.3,37.921) 57.321,37.9 60.5,37.9 61.8,39.2 61.8,62.5 v1(61.3,63)
  Mid-Layer 2 w0.3: v1(4.1,51.1) 5.3,49.9 5.3,47.4 8.4,44.3 v1(8.4,37.1) ; XP1.1 18.03,80.03 6.272,68.272 v1(6.272,64.428) 8,62.7 29,62.7 33.2,58.5 v1(35.7,58.5) ; v1(31.9,37.8) 46.707,37.8 48.907,35.6 51.2,35.6 53.521,37.921 v1(57.3,37.921)
  Mid-Layer 2 w0.5: XP1.1 24.19,81.3 31.81,81.3 XP1.10
pads on no net: DD10.3 DD10.4 DD10.5 DD10.6 DD10.7 DD10.9 REPER1.REP REPER2.REP REPER3.REP REPER4.REP REPER5.REP REPER6.REP

## Polygon pours and split planes (outlines as drawn)
GND on Bottom Layer "NONET_L-01_P-001" (solid, pour order 1): -9.049,81.737 -9.049,8.037 -1.049,0.037 56.951,0.037 64.951,8.037 64.951,81.737 56.951,89.737 -1.049,89.737
GND on Top Layer "NONET_L-01_P-001" (solid, pour order 0): -9.1,81.7 -9.1,8 -1.1,0 56.9,0 64.9,8 64.9,81.7 56.9,89.7 -1.1,89.7

## Keep-outs
Keep-Out Layer:
  the board outline again, w0.1

## Silkscreen, mask and mechanical layers (free items; w line width, h text height)
Top Overlay:
  lines w0.25: 35.55,8.35 39.275,8.35 ; 35.55,10.075 33.825,10.075 37.925,5.975 45.75,5.975 43.388,8.337 ; 37.125,12.225 37.125,14.55 41.675,10 41.675,2.225 39.275,4.625 ; 39.25,8.375 41.662,5.962 ; 39.275,5.975 39.275,4.625 ; 39.275,8.375 39.275,12.256 ; 41.712,8.337 43.375,8.337 43.375,12.225 35.55,12.225 35.55,4.625 39.275,4.625 ; 41.725,4.275 43.425,4.275 43.425,5.95
  text "SHCP" at 23.4,84.6 h1 r90
  text "+5V" at 26,84.6 h1 r90
  text "GND" at 28.5,84.6 h1 r90
  text "DS" at 31,84.6 h1 r90
  text "STCP" at 33.696,84.583 h1 r90
  text "DS" at 26,76.3 h1 r90
  text "GND" at 28.5,75.3 h1 r90
  text "+5V" at 31.1,75.3 h1 r90
  text "STCP" at 23.4,74.3 h1 r90
  text "SHCP" at 33.7,74.3 h1 r90
  text "RZ" at 32.203,11.097 h4 r45
Bottom Overlay:
  text "SHCP" at 22.4,84.6 h1 r270
  text "+5V" at 25,84.6 h1 r270
  text "GND" at 27.5,84.6 h1 r270
  text "DS" at 30,84.6 h1 r270
  text "STCP" at 32.7,84.6 h1 r270
  text "DS" at 25,76.3 h1 r270
  text "GND" at 27.5,75.3 h1 r270
  text "+5V" at 30.1,75.3 h1 r270
  text "STCP" at 22.4,74.3 h1 r270
  text "SHCP" at 32.7,74.3 h1 r270
  text "ALM11" at 30.1,72.2 h1
  text "ALM1" at 57.5,72.2 h1
  text "ALM20" at 16.2,72.1 h1
  text "ALM10" at 44.2,72.1 h1
  text "ALM21" at 2,71.9 h1
  text "ALM12" at 30.4,59.2 h1
  text "ALM2" at 57.5,59.2 h1
  text "ALM19" at 16.4,59.1 h1
  text "ALM9" at 43.7,59.1 h1
  text "ALM22" at 2.2,58.9 h1
  text "ALM3" at 57.5,46.2 h1
  text "ALM13" at 30.3,46.1 h1
  text "ALM8" at 43.7,46.1 h1
  text "ALM18" at 16.3,46 h1
  text "ALM23" at 2.1,45.8 h1
  text "ALM4" at 57.5,33.3 h1
  text "ALM7" at 43.7,33.2 h1
  text "ALM14" at 30.4,33.1 h1
  text "ALM17" at 16.4,33 h1
  text "ALM24" at 2.2,32.8 h1
  text "ALM5" at 57.6,20.2 h1
  text "ALM15" at 30.4,20.1 h1
  text "ALM6" at 43.8,20.1 h1
  text "ALM16" at 16.4,20 h1
  text "ALM25" at 2.2,19.8 h1
  text "NPC RADAR SERVICE" at 44.2,9.2 h2
  text "RGB LEDS PANEL" at 41.1,5.8 h2
  text "v.2023.03.06" at 39.2,2.3 h2
Mechanical 2:
  text "o" at 33.454,31.754 h1
  text "o" at -69.146,29.654 h1
  text "o" at -69.146,23.654 h1
  text "o" at -2.146,22.054 h1
  text "+" at 21.754,19.8 h1
  text "o" at -69.146,17.354 h1
  text "+" at 7.985,17.304 h1
  text "o" at -23.746,16.054 h1
  text "+" at -71.046,13.4 h1
  text "o" at 5.654,10.354 h1
  text "o" at 22.154,10.354 h1
  text "o" at -2.846,10.254 h1
  text "o" at 13.854,10.254 h1
  text "+" at 26.754,9.3 h1
  text "+" at -83.446,7.1 h1
  text "+" at -71.646,5 h1
  text "o" at -66.846,-6.446 h1
  text "+" at -40.015,-6.496 h1
  text "+" at -78.215,-6.996 h1